# Allegro board AD9910_Finished_3rd_allegro.brd
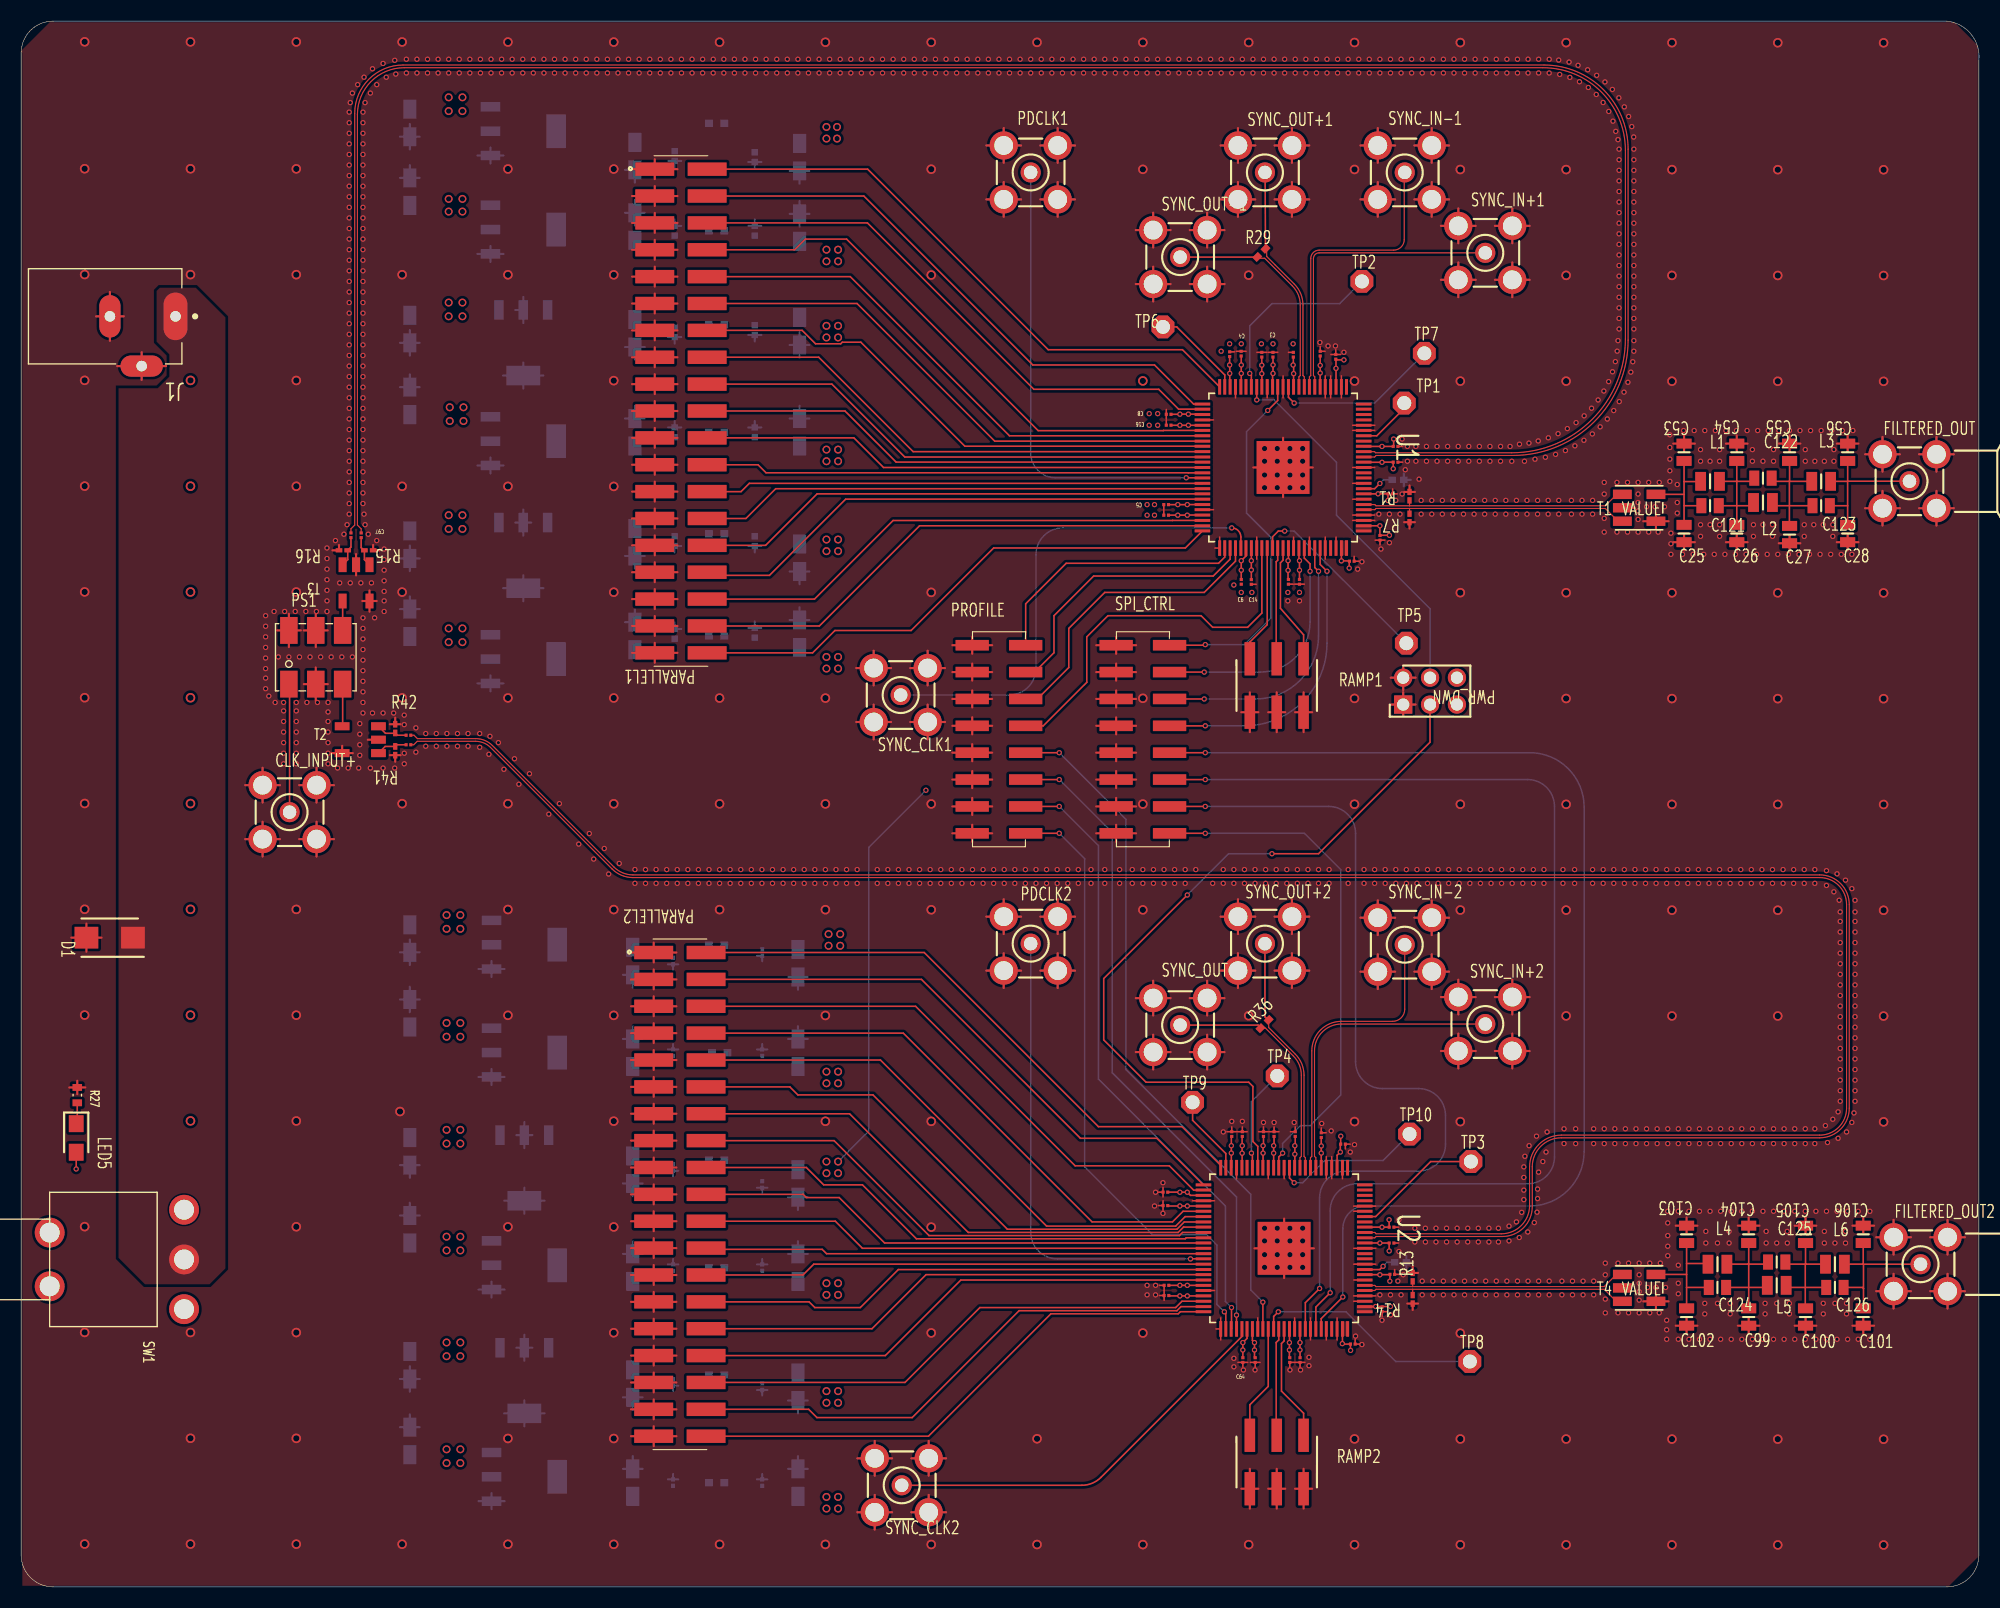
[diagram p0: board, top side]
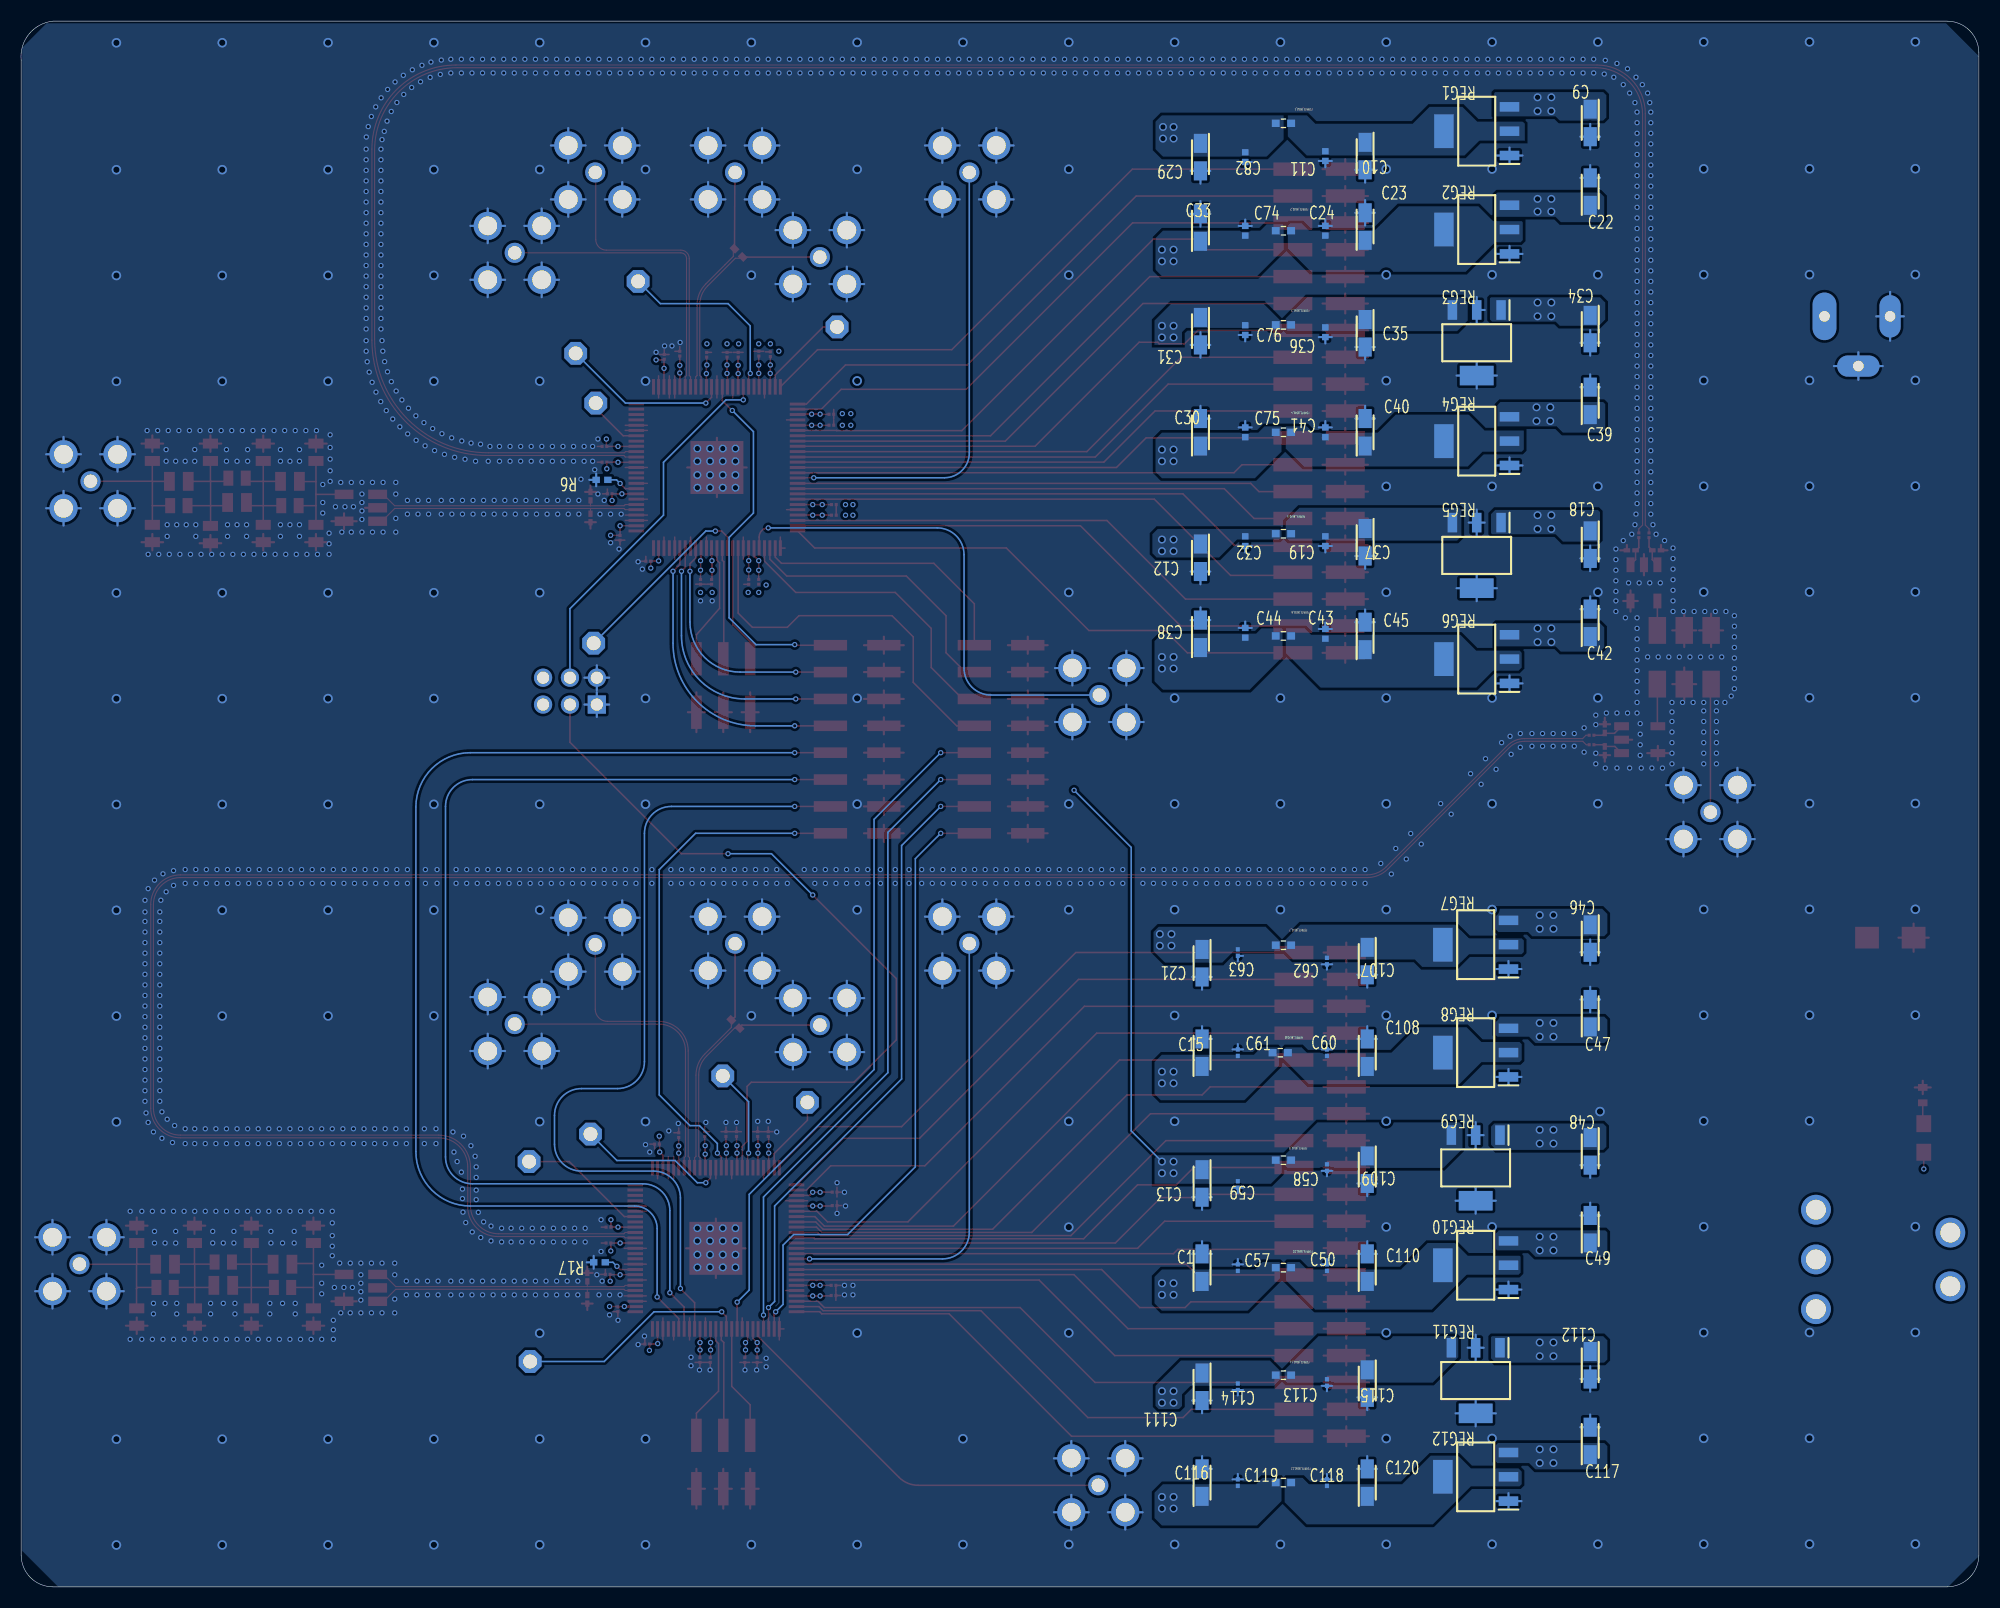
[diagram p1: board, bottom side, seen from below]

Outline 185 x 148 mm; copper layers: TOP, GND, VCC, BOTTOM. Coordinates in mm from the lower left corner of the outline.
Outline path: 0,145 arc(0.88,147.12) 3,148 182,148 arc(184.27,146.77) 185,144.3 185,3 arc(184.12,0.88) 182,0 3,0 arc(0.88,0.88) 0,3 0,145

## Design rules (mm)
constraint set DEFAULT: min track width 0.1
net group DIFF: nets IOUT2_N IOUT2_P IOUT_N IOUT_P REFCLK2_N REFCLK2_P REFCLK_N REFCLK_P SYNCIN1_N SYNCIN1_P SYNCIN2_N SYNCIN2_P SYNCOUT1_N SYNCOUT1_P SYNCOUT2_N SYNCOUT2_P
net group SINGLE: nets CLK_IN CS* CS*2 D0-1 D0-2 D1-1 D1-2 D2-1 D2-2 D3-1 D3-2 D4-1 D4-2 D5-1 D5-2 D6-1 D6-2 D7-1 D7-2 D8-1 D8-2 D9-1 D9-2 D10-1 D10-2 D11-1 D11-2 D12-1 D12-2 D13-1 D13-2 D14-1 D14-2 D15-1 D15-2 DAC_RSET DAC_RSET2 DRCTL1 DRCTL2 DRHOLD1 DRHOLD2 DROVER DROVER2 EXT_PWR_DWN EXT_PWR_DWN2 F0-1 F0-2 F1-1 F1-2 I_O_UPDATE_1 I_O_UPDATE_2 MASTER_RESET MASTER_RESET2 N5 N_1 N_5 N_6 N_7 N_8 N_9 N_20 N_22 N_26 N_32 N_36 N_40 N_41 N_42 OSK1 OSK2 PDCLK PDCLK2 PLL_LOCK PLL_LOCK2 PROFILE0 PROFILE0-2 PROFILE1 PROFILE1-2 PROFILE2 PROFILE2-2 RAM_SWP_OVER RAM_SWP_OVER2 REFCLK_OUT REFCLK_OUT2 SCLK SCLK2 SDIO SDIO2 SYNC_CLK SYNC_CLK2 SYNC_SMP_ERR SYNC_SMP_ERR2 TXENABLE1 TXENABLE2
nets with their own width: min track width 0.1; nets GND
nets with their own width: min track width 0.145; nets CLK_VDD_1 CLK_VDD_2 CLK_VDD_3 CLK_VDD_4 CLK_VDD_5 CLK_VDD_6 DAC_VDD DAC_VDD2 DVDD2(1.8V) DVDD(1.8V) DVDD_I_O2(3.3V) DVDD_I_O(3.3V) VCC

## Placement (name value [footprint] x y rotation side)
C1  VALUE  [CAPPM3216X180N]  73.41 30.17 90 bottom
C2  VALUE  [CAPC0402X22N]  120.22 116.47 90 top
C3  VALUE  [CAPC0402X22N]  118.3 116.47 90 top
C4  VALUE  [CAPC0402X22N]  115.29 116.57 90 top
C5  VALUE  [CAPC0402X22N]  108.2 102.3 180 top
C6  VALUE  [CAPC0402X22N]  115.3 95 270 top
C7  VALUE  [CAPC0402X22N]  120.8 95 270 top
C8  VALUE  [CAPC0402X22N]  108.44 110.84 180 top
C9  VALUE  [CAPPM3216X180N]  36.73 138.38 270 bottom
C10  VALUE  [CAPPM3216X180N]  58 135.25 270 bottom
C11  VALUE  [CAPC1005X22N]  61.76 135.25 270 bottom
C12  VALUE  [CAPPM3216X180N]  73.56 97.28 270 bottom
C13  VALUE  [CAPPM3216X180N]  73.41 38.13 270 bottom
C14  VALUE  [CAPC0402X22N]  116.25 94.99 270 top
C15  VALUE  [CAPPM3216X180N]  73.41 50.49 90 bottom
C16  VALUE  [CAPC0402X22N]  108.44 109.81 180 top
C17  VALUE  [CAPC0402X22N]  117.24 116.47 90 top
C18  -  [CAPPM3216X180N]  36.73 98.52 270 bottom
C19  VALUE  [CAPC1005X22N]  61.76 98.85 270 bottom
C20  VALUE  [CAPC0402X22N]  129.88 107.8 0 top
C21  VALUE  [CAPPM3216X180N]  73.41 58.95 270 bottom
C22  -  [CAPPM3216X180N]  36.73 131.89 90 bottom
C23  VALUE  [CAPPM3216X180N]  58 128.59 90 bottom
C24  VALUE  [CAPC1005X22N]  61.76 128.19 90 bottom
C25  VALUE  [CAPC2012X100N]  157.14 99.57 270 top
C26  VALUE  [CAPC2012X100N]  162.12 99.57 270 top
C27  VALUE  [CAPC2012X100N]  167.11 99.47 270 top
C28  VALUE  [CAPC2012X100N]  172.6 99.57 270 top
C29  VALUE  [CAPPM3216X180N]  73.56 135.15 270 bottom
C30  -  [CAPPM3216X180N]  73.56 109.14 90 bottom
C31  VALUE  [CAPPM3216X180N]  73.56 118.7 270 bottom
C32  VALUE  [CAPC1005X22N]  69.33 98.85 270 bottom
C33  VALUE  [CAPPM3216X180N]  73.56 128.49 90 bottom
C34  VALUE  [CAPPM3216X180N]  36.73 118.9 270 bottom
C35  VALUE  [CAPPM3216X180N]  58 118.5 270 bottom
C36  VALUE  [CAPC1005X22N]  61.76 118.6 270 bottom
C37  VALUE  [CAPPM3216X180N]  58 98.75 270 bottom
C38  VALUE  [CAPPM3216X180N]  73.56 90.09 90 bottom
C39  VALUE  [CAPPM3216X180N]  36.73 112.11 90 bottom
C40  -  [CAPPM3216X180N]  58 109.14 90 bottom
C41  VALUE  [CAPC1005X22N]  61.76 109.14 90 bottom
C42  -  [CAPPM3216X180N]  36.73 91.13 90 bottom
C43  VALUE  [CAPC1005X22N]  61.76 90.09 90 bottom
C44  VALUE  [CAPC1005X22N]  69.33 90.19 90 bottom
C45  VALUE  [CAPPM3216X180N]  58 89.89 90 bottom
C46  VALUE  [CAPPM3216X180N]  36.73 61.28 270 bottom
C47  VALUE  [CAPPM3216X180N]  36.73 54.22 90 bottom
C48  VALUE  [CAPPM3216X180N]  36.73 41.16 270 bottom
C49  VALUE  [CAPPM3216X180N]  36.73 33.81 90 bottom
C50  VALUE  [CAPC0502X28N]  61.61 30.17 90 bottom
C51  VALUE  [CAPC0402X22N]  36.6 79.6 0 top
C52  VALUE  [CAPC0402X22N]  36.6 80.5 180 top
C53  -  [CAPC2012X100N]  157.14 107.25 90 top
C54  VALUE  [CAPC2012X100N]  162.12 107.25 90 top
C55  VALUE  [CAPC2012X100N]  167.11 107.25 90 top
C56  VALUE  [CAPC2012X100N]  172.6 107.25 90 top
C57  VALUE  [CAPC0502X28N]  70.03 30.17 90 bottom
C58  VALUE  [CAPC0502X28N]  61.61 39.63 270 bottom
C59  VALUE  [CAPC0502X28N]  70.03 38.03 270 bottom
C60  VALUE  [CAPC0502X28N]  61.61 50.49 90 bottom
C61  VALUE  [CAPC0502X28N]  70.03 50.49 90 bottom
C62  VALUE  [CAPC0502X28N]  61.61 59.15 270 bottom
C63  VALUE  [CAPC0502X28N]  70.03 59.95 270 bottom
C64  VALUE  [CAPC0402X22N]  115.45 21.44 270 top
C65  VALUE  [CAPC0402X22N]  119.76 95 270 top
C66  VALUE  [CAPC0402X22N]  108.2 101.3 180 top
C67  VALUE  [CAPC0402X22N]  114.2 116.52 90 top
C68  VALUE  [CAPC0402X22N]  124.23 116.27 90 top
C69  VALUE  [CAPC0402X22N]  122.76 116.57 90 top
C70  VALUE  [CAPC0402X22N]  129.38 103.32 0 top
C71  VALUE  [CAPC0402X22N]  128.41 99.16 270 top
C72  VALUE  [CAPC0402X22N]  125.75 96.95 0 top
C73  VALUE  [CAPC0402X22N]  120.86 21.44 270 top
C74  -  [CAPC1005X22N]  69.33 128.19 90 bottom
C75  VALUE  [CAPC1005X22N]  69.33 109.14 90 bottom
C76  VALUE  [CAPC1005X22N]  69.33 118.8 270 bottom
C77  VALUE  [CAPC0402X22N]  120.4 42.8 90 top
C78  VALUE  [CAPC0402X22N]  108.23 28.5 180 top
C79  VALUE  [CAPC0402X22N]  108.13 37.31 180 top
C80  VALUE  [CAPC0402X22N]  115.4 42.8 90 top
C81  VALUE  [CAPC0402X22N]  129.88 106.31 0 top
C82  -  [CAPC1005X22N]  69.33 135.15 270 bottom
C83  VALUE  [CAPC0402X22N]  118.4 42.8 90 top
C84  VALUE  [CAPC0402X22N]  128.61 26.24 270 top
C85  VALUE  [CAPC0402X22N]  125.84 22.95 0 top
C86  VALUE  [CAPC0402X22N]  129.57 29.54 0 top
C87  VALUE  [CAPC0402X22N]  117.4 42.8 90 top
C88  VALUE  [CAPC0402X22N]  119.88 21.44 270 top
C89  VALUE  [CAPC0402X22N]  108.23 27.54 180 top
C90  VALUE  [CAPC0402X22N]  114.4 42.8 90 top
C91  VALUE  [CAPC0402X22N]  108.13 36.04 180 top
C92  VALUE  [CAPC0402X22N]  116.62 21.44 270 top
C93  VALUE  [CAPC0402X22N]  124.92 41.85 0 top
C94  VALUE  [CAPC0402X22N]  122.86 42.7 90 top
C95  VALUE  [CAPC0402X22N]  129.5 34 0 top
C96  VALUE  [CAPC0402X22N]  129.5 32.5 0 top
C97  VALUE  [CAPC0402X22N]  32.13 99.4 90 top
C98  VALUE  [CAPC0402X22N]  31.16 99.4 90 top
C99  -  [CAPC2012X100N]  163.25 25.5 270 top
C100  VALUE  [CAPC2012X100N]  168.62 25.5 270 top
C101  VALUE  [CAPC2012X100N]  174.08 25.5 270 top
C102  VALUE  [CAPC2012X100N]  157.38 25.5 270 top
C103  VALUE  [CAPC2012X100N]  157.38 33.32 90 top
C104  VALUE  [CAPC2012X100N]  163.25 33.32 90 top
C105  VALUE  [CAPC2012X100N]  168.62 33.32 90 top
C106  VALUE  [CAPC2012X100N]  174.08 33.32 90 top
C107  VALUE  [CAPPM3216X180N]  57.8 59.15 270 bottom
C108  VALUE  [CAPPM3216X180N]  57.8 50.49 90 bottom
C109  VALUE  [CAPPM3216X180N]  57.8 39.43 270 bottom
C110  VALUE  [CAPPM3216X180N]  57.8 30.17 90 bottom
C111  VALUE  [CAPPM3216X180N]  73.41 18.91 270 bottom
C112  -  [CAPPM3216X180N]  36.73 20.95 270 bottom
C113  VALUE  [CAPC0502X28N]  61.61 19.31 270 bottom
C114  VALUE  [CAPC0502X28N]  70.03 18.91 270 bottom
C115  VALUE  [CAPPM3216X180N]  57.8 19.21 270 bottom
C116  VALUE  [CAPPM3216X180N]  73.41 9.85 90 bottom
C117  -  [CAPPM3216X180N]  36.73 13.79 90 bottom
C118  VALUE  [CAPC0502X28N]  61.61 9.85 90 bottom
C119  VALUE  [CAPC0502X28N]  70.03 9.85 90 bottom
C120  VALUE  [CAPPM3216X180N]  57.8 9.85 90 bottom
C121  VALUE  [CAPC2012X100N]  159.6 102.2 0 top
C122  VALUE  [CAPC2012X100N]  164.6 104.8 0 top
C123  VALUE  [CAPC2012X100N]  170.1 102.2 0 top
C124  VALUE  [CAPC2012X100N]  160.3 28.3 0 top
C125  VALUE  [CAPC2012X100N]  165.9 30.7 0 top
C126  VALUE  [CAPC2012X100N]  171.4 28.3 0 top
CLK_INPUT+  BU-SMA-V  [CON-COAX_BU-SMA-V]  25.36 73.23 0 top
D1  SMBJ5340B-TP  [DIOM5336X241N]  8.37 61.37 180 top
FERRITE_BEAD_1  VALUE  [WE-CBF_0603_W]  65.72 138.35 0 bottom
FERRITE_BEAD_2  VALUE  [WE-CBF_0603_W]  65.72 128.19 0 bottom
FERRITE_BEAD_3  -  [WE-CBF_0603_W]  65.72 119.3 0 bottom
FERRITE_BEAD_4  -  [WE-CBF_0603_W]  65.72 109.14 0 bottom
FERRITE_BEAD_5  VALUE  [WE-CBF_0603_W]  65.72 99.55 0 bottom
FERRITE_BEAD_6  VALUE  [WE-CBF_0603_W]  65.72 89.89 0 bottom
FERRITE_BEAD_7  VALUE  [WE-CBF_0603_W]  65.72 60.65 0 bottom
FERRITE_BEAD_8  VALUE  [WE-CBF_0603_W]  66.02 50.49 0 bottom
FERRITE_BEAD_9  -  [WE-CBF_0603_W]  65.72 40.33 0 bottom
FERRITE_BEAD_10  -  [WE-CBF_0603_W]  65.72 30.17 0 bottom
FERRITE_BEAD_11  VALUE  [WE-CBF_0603_W]  65.72 20.01 0 bottom
FERRITE_BEAD_12  VALUE  [WE-CBF_0603_W]  65.72 9.85 0 bottom
FILTERED_OUT  -  [BU-SMA-H]  178.45 104.51 0 top
FILTERED_OUT2  -  [BU-SMA-H]  179.49 30.5 0 top
J1  KLDX-0202-AC  [KYCON_KLDX-0202-AC]  7.94 120.1 180 top
L1  VALUE  [LQW2BAN11NG00L]  159.6 104.5 0 top
L2  VALUE  [LQW2BAN11NG00L]  164.6 102.5 0 top
L3  VALUE  [LQW2BAN11NG00L]  170.1 104.5 0 top
L4  VALUE  [LQW2BAN11NG00L]  160.3 30.5 0 top
L5  VALUE  [LQW2BAN11NG00L]  165.9 28.5 0 top
L6  VALUE  [LQW2BAN11NG00L]  171.4 30.5 0 top
LED5  SML-811UTT86C  [LEDC3412X115N]  5.2 42.43 270 top
PARALLEL1  TSM-119-04-L-DV  [TSM-119-YY-ZZZ-DV]  62.35 111.15 90 top
PARALLEL2  TSM-119-04-L-DV  [TSM-119-YY-ZZZ-DV]  62.25 37.1 90 top
PDCLK1  BU-SMA-V  [CON-COAX_BU-SMA-V]  95.4 133.7 90 top
PDCLK2  BU-SMA-V  [CON-COAX_BU-SMA-V]  95.4 60.8 0 top
PROFILE  M20-8760842P  [M208760842P]  92.4 80.12 270 top
PS1  ADP-2-10  [CD636]  25.3 85.33 0 top
PWR_DWN  67996-106HLF  [HDRV6W67P254_2X3_762X483X858P]  130.6 83.4 0 top
R1  VALUE  [RESC0603X26N]  131.2 103.1 90 top
R6  VALUE  [RESC1005X40N]  130.11 104.64 0 bottom
R7  VALUE  [RESC0603X26N]  131.2 101.04 90 top
R13  VALUE  [RESC0603X26N]  131.5 29.27 90 top
R14  VALUE  [RESC0603X26N]  131.5 27.18 90 top
R15  VALUE  [RESC0603X28N]  32.85 97.98 180 top
R16  VALUE  [RESC0603X28N]  30.45 97.98 0 top
R17  VALUE  [RESC1005X40N]  130.35 30.68 0 bottom
R27  300  [RES_ERA3VEB3000V]  5.3 46.48 270 top
R29  VALUE  [RESC1005X35N]  117.2 126.1 45 top
R36  VALUE  [RESC1005X35N]  117.5 53.2 45 top
R41  VALUE  [RESC0603X28N]  35.35 79.03 90 top
R42  VALUE  [RESC0603X28N]  35.35 81.13 270 top
RAMP1  M20-8760342R  [M208760342R]  118.65 85.2 0 top
RAMP2  M20-8760342R  [M208760342R]  118.65 11.8 0 top
REG1  VALUE  [SOT230P700X180-4N]  47.45 137.6 0 bottom
REG2  VALUE  [SOT230P700X180-4N]  47.45 128.3 0 bottom
REG3  VALUE  [SOT230P700X180-4N]  47.45 117.6 270 bottom
REG4  VALUE  [SOT230P700X180-4N]  47.45 108.3 0 bottom
REG5  VALUE  [SOT230P700X180-4N]  47.45 97.5 270 bottom
REG6  VALUE  [SOT230P700X180-4N]  47.45 87.7 0 bottom
REG7  AZ1117CH-1.8TRG1  [SOT230P700X180-4N]  47.55 60.7 0 bottom
REG8  AZ1117CH-1.8TRG1  [SOT230P700X180-4N]  47.55 50.5 0 bottom
REG9  TPS7B8333QDCYRQ1  [SOT230P700X180-4N]  47.55 39.6 270 bottom
REG10  AZ1117CH-1.8TRG1  [SOT230P700X180-4N]  47.55 30.4 0 bottom
REG11  TPS7B8333QDCYRQ1  [SOT230P700X180-4N]  47.55 19.5 270 bottom
REG12  AZ1117CH-1.8TRG1  [SOT230P700X180-4N]  47.55 10.4 0 bottom
SPI_CTRL  M20-8760842P  [M208760842P]  106 80.12 270 top
SW1  100SP1T2B4M6QE  [TOGGLE_RA]  2.69 30.95 270 top
SYNC_CLK1  BU-SMA-V  [CON-COAX_BU-SMA-V]  83.11 84.3 90 top
SYNC_CLK2  BU-SMA-V  [CON-COAX_BU-SMA-V]  83.21 9.6 270 top
SYNC_IN+1  BU-SMA-V  [CON-COAX_BU-SMA-V]  138.36 126.1 90 top
SYNC_IN+2  BU-SMA-V  [CON-COAX_BU-SMA-V]  138.36 53.2 0 top
SYNC_IN-1  BU-SMA-V  [CON-COAX_BU-SMA-V]  130.75 133.7 90 top
SYNC_IN-2  BU-SMA-V  [CON-COAX_BU-SMA-V]  130.75 60.7 0 top
SYNC_OUT+1  BU-SMA-V  [CON-COAX_BU-SMA-V]  117.54 133.7 90 top
SYNC_OUT+2  BU-SMA-V  [CON-COAX_BU-SMA-V]  117.54 60.8 0 top
SYNC_OUT-1  BU-SMA-V  [CON-COAX_BU-SMA-V]  109.52 125.7 90 top
SYNC_OUT-2  BU-SMA-V  [CON-COAX_BU-SMA-V]  109.52 53.1 0 top
T1  TC2-72T+  [AT1521_MNC]  152.9 102 0 top
T2  ETC1-1-13TR  [SM22]  32.05 80.08 270 top
T3  ETC1-1-13TR  [SM22]  31.65 94.9 0 top
T4  TC2-72T+  [AT1521_MNC]  152.9 28.26 0 top
TP1  TPPAD1-13  [P1-13]  130.7 111.9 0 top
TP2  TPPAD1-13  [P1-13]  126.7 123.4 0 top
TP3  TPPAD1-13  [P1-13]  137 40.2 0 top
TP4  TPPAD1-13  [P1-13]  118.7 48.3 0 top
TP5  TPPAD1-13  [P1-13]  130.9 89.2 0 top
TP6  TPPAD1-13  [P1-13]  107.9 119.1 0 top
TP7  TPPAD1-13  [P1-13]  132.6 116.6 0 top
TP8  TPPAD1-13  [P1-13]  136.9 21.3 0 top
TP9  TPPAD1-13  [P1-13]  110.7 45.8 0 top
TP10  TPPAD1-13  [P1-13]  131.2 42.8 0 top
U1  AD9910BSVZ  [QFP50P1600X1600X120-101N]  119.25 105.81 270 top
U2  AD9910BSVZ  [QFP50P1600X1600X120-101N]  119.35 32 270 top

## Library data of the parts
C1 C9 C10 C12 C13 C15 C18 C21-C23 C29-C31 C33-C35 C37-C40 C42 C45-C49 C107-C112 C115-C117 C120 = CAPPM3216X180N
C2-C8 C14 C16 C17 C20 C51 C52 C64-C73 C77-C81 C83-C98 = CAPC0402X22N
C11 C19 C24 C32 C36 C41 C43 C44 C74-C76 C82 = CAPC1005X22N
C25-C28 C53-C56 C99-C106 C121-C126 = CAPC2012X100N
C50 C57-C63 C113 C114 C118 C119 = CAPC0502X28N
CLK_INPUT+ PDCLK1 PDCLK2 SYNC_CLK1 SYNC_CLK2 SYNC_IN+1 SYNC_IN+2 SYNC_IN-1 SYNC_IN-2 SYNC_OUT+1 SYNC_OUT+2 SYNC_OUT-1 SYNC_OUT-2 = CON-COAX_BU-SMA-V
D1 = DIOM5336X241N
FERRITE_BEAD_1-FERRITE_BEAD_12 = WE-CBF_0603_W
FILTERED_OUT FILTERED_OUT2 = BU-SMA-H
J1 = KYCON_KLDX-0202-AC
L1-L6 = LQW2BAN11NG00L
LED5 = LEDC3412X115N
PARALLEL1 PARALLEL2 = TSM-119-YY-ZZZ-DV
PROFILE SPI_CTRL = M208760842P
PS1 = CD636
PWR_DWN = HDRV6W67P254_2X3_762X483X858P
R1 R7 R13 R14 = RESC0603X26N
R6 R17 = RESC1005X40N
R15 R16 R41 R42 = RESC0603X28N
R27 = RES_ERA3VEB3000V
R29 R36 = RESC1005X35N
RAMP1 RAMP2 = M208760342R
REG1-REG12 = SOT230P700X180-4N
SW1 = TOGGLE_RA
T1 T4 = AT1521_MNC
T2 T3 = SM22
TP1-TP10 = P1-13
U1 U2 = QFP50P1600X1600X120-101N

## Footprints (pads in the part's own frame, mm; a bottom-side part is the same pattern mirrored in y, then rotated)
AT1521_MNC
  rect 1.778x0.889 smd: 1(-1.587,-1.27) 2(-1.587,0) 3(-1.587,1.27) 4(1.587,1.27) 6(1.587,-1.27)
BU-SMA-H
  round 1.905 hole 1.27: 1(0,0)
  round 2.667 hole 1.778: 2(-2.55,2.55) 3(2.55,2.55) 4(2.55,-2.55) 5(-2.55,-2.55)
CAPC0402X22N
  rect 0.29x0.3 smd: 1(-0.222,0) 2(0.222,0)
CAPC0502X28N
  rect 0.415x0.38 smd: 1(-0.308,0) 2(0.308,0)
CAPC1005X22N
  rect 0.6x0.62 smd: 1(-0.46,0) 2(0.46,0)
CAPC2012X100N
  rect 0.94x1.43 smd: 1(-0.82,0) 2(0.82,0)
CAPPM3216X180N
  rect 1.8x1.25 smd: 1(-1.3,0) 2(1.3,0)
CD636
  rect 1.651x2.54 smd: 1(0,0) 2(2.54,0) 3(5.08,0) 4(5.08,5.08) 5(2.54,5.08) 6(0,5.08)
CON-COAX_BU-SMA-V
  round 1.905 hole 1.27: 1(0,0)
  round 2.667 hole 1.778: 2(-2.55,2.55) 3(2.55,2.55) 4(2.55,-2.55) 5(-2.55,-2.55)
DIOM5336X241N
  rect 2.25x2.05 smd: 1(-2.2,0) 2(2.2,0)
HDRV6W67P254_2X3_762X483X858P
  rect 1.725x1.725 hole 1.15: 1(0,0)
  round 1.725 hole 1.15: 2(0,2.54) 3(2.54,0) 4(2.54,2.54) 5(5.08,0) 6(5.08,2.54)
KYCON_KLDX-0202-AC
  oval 2.25x4.5 hole 1: 1(-6.65,0)
  oval 2x4 hole 1: 2(-0.45,0)
  oval 4x2 hole 1: 3(-3.45,4.7)
LEDC3412X115N
  rect 1.6x1.4 smd: 1(-1.35,0) 2(1.35,0)
LQW2BAN11NG00L
  rect 1.02x1.78 smd: 1(-0.89,0) 2(0.89,0)
M208760342R
  rect 1x3.15 smd: 1(-2.54,-2.525) 2(-2.54,2.525) 3(0,-2.525) 4(0,2.525) 5(2.54,-2.525) 6(2.54,2.525)
M208760842P
  rect 1x3.15 smd: 1(-8.89,-2.525) 2(-8.89,2.525) 3(-6.35,-2.525) 4(-6.35,2.525) 5(-3.81,-2.525) 6(-3.81,2.525) 7(-1.27,-2.525) 8(-1.27,2.525) 9(1.27,-2.525) 10(1.27,2.525) 11(3.81,-2.525) 12(3.81,2.525) 13(6.35,-2.525) 14(6.35,2.525) 15(8.89,-2.525) 16(8.89,2.525)
P1-13
  rrect 2.159x2.159 hole 1.321: TP(0,0)
QFP50P1600X1600X120-101N
  rect 1.473x0.279 smd: 1(-7.62,5.994) 2(-7.62,5.512) 3(-7.62,5.004) 4(-7.62,4.496) 5(-7.62,3.988) 6(-7.62,3.505) 7(-7.62,2.997) 8(-7.62,2.489) 9(-7.62,2.007) 10(-7.62,1.499) 11(-7.62,0.991) 12(-7.62,0.508) 13(-7.62,0) 14(-7.62,-0.508) 15(-7.62,-0.991) 16(-7.62,-1.499) 17(-7.62,-2.007) 18(-7.62,-2.489) 19(-7.62,-2.997) 20(-7.62,-3.505) 21(-7.62,-3.988) 22(-7.62,-4.496) 23(-7.62,-5.004) 24(-7.62,-5.512) 25(-7.62,-5.994) 51(7.62,-5.994) 52(7.62,-5.512) 53(7.62,-5.004) 54(7.62,-4.496) 55(7.62,-3.988) 56(7.62,-3.505) 57(7.62,-2.997) 58(7.62,-2.489) 59(7.62,-2.007) 60(7.62,-1.499) 61(7.62,-0.991) 62(7.62,-0.508) 63(7.62,0) 64(7.62,0.508) 65(7.62,0.991) 66(7.62,1.499) 67(7.62,2.007) 68(7.62,2.489) 69(7.62,2.997) 70(7.62,3.505) 71(7.62,3.988) 72(7.62,4.496) 73(7.62,5.004) 74(7.62,5.512) 75(7.62,5.994)
  rect 0.279x1.473 smd: 26(-5.994,-7.62) 27(-5.512,-7.62) 28(-5.004,-7.62) 29(-4.496,-7.62) 30(-3.988,-7.62) 31(-3.505,-7.62) 32(-2.997,-7.62) 33(-2.489,-7.62) 34(-2.007,-7.62) 35(-1.499,-7.62) 36(-0.991,-7.62) 37(-0.508,-7.62) 38(0,-7.62) 39(0.508,-7.62) 40(0.991,-7.62) 41(1.499,-7.62) 42(2.007,-7.62) 43(2.489,-7.62) 44(2.997,-7.62) 45(3.505,-7.62) 46(3.988,-7.62) 47(4.496,-7.62) 48(5.004,-7.62) 49(5.512,-7.62) 50(5.994,-7.62) 76(5.994,7.62) 77(5.512,7.62) 78(5.004,7.62) 79(4.496,7.62) 80(3.988,7.62) 81(3.505,7.62) 82(2.997,7.62) 83(2.489,7.62) 84(2.007,7.62) 85(1.499,7.62) 86(0.991,7.62) 87(0.508,7.62) 88(0,7.62) 89(-0.508,7.62) 90(-0.991,7.62) 91(-1.499,7.62) 92(-2.007,7.62) 93(-2.489,7.62) 94(-2.997,7.62) 95(-3.505,7.62) 96(-3.988,7.62) 97(-4.496,7.62) 98(-5.004,7.62) 99(-5.512,7.62) 100(-5.994,7.62)
  rect 5.004x5.004 smd: 101(0,0)
RES_ERA3VEB3000V
  rect 0.65x0.9 smd: 1(-0.725,0) 2(0.725,0)
RESC0603X26N
  rect 0.6x0.4 smd: 1(-0.4,0) 2(0.4,0)
RESC0603X28N
  rect 0.625x0.4 smd: 1(-0.412,0) 2(0.412,0)
RESC1005X35N
  rect 0.75x0.6 smd: 1(-0.55,0) 2(0.55,0)
RESC1005X40N
  rect 0.7x0.6 smd: 1(-0.55,0) 2(0.55,0)
SM22
  rect 0.762x1.397 smd: 1(-1.27,1.714) 2(0,1.714) 3(1.27,1.714) 4(1.27,-1.714) 5(-1.27,-1.714)
SOT230P700X180-4N
  rect 1.85x0.9 smd: 1(-3.1,2.3) 2(-3.1,0) 3(-3.1,-2.3)
  rect 1.85x3.2 smd: 4(3.1,0)
TOGGLE_RA
  round 2.819 hole 1.88: 1(4.699,12.7) 2(0,12.7) 3(-4.699,12.7) P_4(-2.54,0) P_5(2.54,0)
TSM-119-YY-ZZZ-DV
  rect 1.27x3.68 smd: 1(22.86,2.475) 2(22.86,-2.475) 3(20.32,2.475) 4(20.32,-2.475) 5(17.78,2.475) 6(17.78,-2.475) 7(15.24,2.475) 8(15.24,-2.475) 9(12.7,2.475) 10(12.7,-2.475) 11(10.16,2.475) 12(10.16,-2.475) 13(7.62,2.475) 14(7.62,-2.475) 15(5.08,2.475) 16(5.08,-2.475) 17(2.54,2.475) 18(2.54,-2.475) 19(0,2.475) 20(0,-2.475) 21(-2.54,2.475) 22(-2.54,-2.475) 23(-5.08,2.475) 24(-5.08,-2.475) 25(-7.62,2.475) 26(-7.62,-2.475) 27(-10.16,2.475) 28(-10.16,-2.475) 29(-12.7,2.475) 30(-12.7,-2.475) 31(-15.24,2.475) 32(-15.24,-2.475) 33(-17.78,2.475) 34(-17.78,-2.475) 35(-20.32,2.475) 36(-20.32,-2.475) 37(-22.86,2.475) 38(-22.86,-2.475)
WE-CBF_0603_W
  rect 0.75x0.7 smd: 1(-0.725,0) 2(0.725,0)

## Nets
DVDD1.8V1: C40.1 C41.1 FERRITE_BEAD_4.1 REG4.2 REG4.4
DVDD1.8V2: C50.1 C110.1 FERRITE_BEAD_10.1 REG10.2 REG10.4
DVDD2(1.8V): C1.1 C57.1 C87.1 C88.1 C89.1 C90.1 C91.1 C92.1 FERRITE_BEAD_10.2 U2.17 U2.23 U2.30 U2.47 U2.57 U2.64
DVDD3.3V1: C35.1 C36.1 FERRITE_BEAD_3.1 REG3.3
DVDD3.3V2: C58.1 C109.1 FERRITE_BEAD_9.1 REG9.3
DVDD(1.8V): C14.1 C16.1 C17.1 C30.1 C65.1 C66.1 C67.1 C75.1 FERRITE_BEAD_4.2 U1.17 U1.23 U1.30 U1.47 U1.57 U1.64
DVDD_I_O2(3.3V): C13.1 C59.1 C64.1 C73.1 C77.1 C78.1 C79.1 C80.1 C83.1 FERRITE_BEAD_9.2 PWR_DWN.5 PWR_DWN.6 U2.11 U2.15 U2.21 U2.28 U2.45 U2.56 U2.66
DVDD_I_O(3.3V): C2.1 C3.1 C4.1 C5.1 C6.1 C7.1 C8.1 C31.1 C76.1 FERRITE_BEAD_3.2 U1.11 U1.15 U1.21 U1.28 U1.45 U1.56 U1.66
GND: C1.2 C2.2 C3.2 C4.2 C5.2 C6.2 C7.2 C8.2 C9.2 C10.2 C11.2 C12.2 C13.2 C14.2 C15.2 C16.2 C17.2 C18.2 C19.2 C20.2 C21.2 C22.2 C23.2 C24.2 C25.2 C26.2 C27.2 C28.2 C29.2 C30.2 C31.2 C32.2 C33.2 C34.2 C35.2 C36.2 C37.2 C38.2 C39.2 C40.2 C41.2 C42.2 C43.2 C44.2 C45.2 C46.2 C47.2 C48.2 C49.2 C50.2 C53.2 C54.2 C55.2 C56.2 C57.2 C58.2 C59.2 C60.2 C61.2 C62.2 C63.2 C64.2 C65.2 C66.2 C67.2 C68.2 C69.2 C70.2 C71.2 C72.2 C73.2 C74.2 C75.2 C76.2 C77.2 C78.2 C79.2 C80.2 C81.2 C82.2 C83.2 C84.2 C85.2 C86.2 C87.2 C88.2 C89.2 C90.2 C91.2 C92.2 C93.2 C94.2 C95.2 C96.2 C99.2 C100.2 C101.2 C102.2 C103.2 C104.2 C105.2 C106.2 C107.2 C108.2 C109.2 C110.2 C111.2 C112.2 C113.2 C114.2 C115.2 C116.2 C117.2 C118.2 C119.2 C120.2 CLK_INPUT+.2 CLK_INPUT+.3 CLK_INPUT+.4 CLK_INPUT+.5 D1.2 FILTERED_OUT.2 FILTERED_OUT.3 FILTERED_OUT.4 FILTERED_OUT.5 FILTERED_OUT2.2 FILTERED_OUT2.3 FILTERED_OUT2.4 FILTERED_OUT2.5 J1.2 J1.3 PARALLEL1.1 PARALLEL1.3 PARALLEL1.5 PARALLEL1.7 PARALLEL1.9 PARALLEL1.11 PARALLEL1.13 PARALLEL1.15 PARALLEL1.17 PARALLEL1.19 PARALLEL1.21 PARALLEL1.23 PARALLEL1.25 PARALLEL1.27 PARALLEL1.29 PARALLEL1.31 PARALLEL1.33 PARALLEL1.35 PARALLEL1.37 PARALLEL2.1 PARALLEL2.3 PARALLEL2.5 PARALLEL2.7 PARALLEL2.9 PARALLEL2.11 PARALLEL2.13 PARALLEL2.15 PARALLEL2.17 PARALLEL2.19 PARALLEL2.21 PARALLEL2.23 PARALLEL2.25 PARALLEL2.27 PARALLEL2.29 PARALLEL2.31 PARALLEL2.33 PARALLEL2.35 PARALLEL2.37 PDCLK1.2 PDCLK1.3 PDCLK1.4 PDCLK1.5 PDCLK2.2 PDCLK2.3 PDCLK2.4 PDCLK2.5 PROFILE.1 PROFILE.3 PROFILE.5 PROFILE.7 PROFILE.9 PROFILE.11 PROFILE.13 PROFILE.15 PS1.2 PS1.5 PS1.6 PWR_DWN.1 PWR_DWN.2 R1.2 R6.2 R7.1 R13.2 R14.1 R15.1 R16.1 R17.2 R27.1 R41.1 R42.1 RAMP1.1 RAMP1.3 RAMP1.5 RAMP2.1 RAMP2.3 RAMP2.5 REG1.1 REG2.1 REG3.2 REG3.4 REG4.1 REG5.2 REG5.4 REG6.1 REG7.1 REG8.1 REG9.2 REG9.4 REG10.1 REG11.2 REG11.4 REG12.1 SPI_CTRL.1 SPI_CTRL.3 SPI_CTRL.5 SPI_CTRL.7 SPI_CTRL.9 SPI_CTRL.11 SPI_CTRL.13 SPI_CTRL.15 SYNC_CLK1.2 SYNC_CLK1.3 SYNC_CLK1.4 SYNC_CLK1.5 SYNC_CLK2.2 SYNC_CLK2.3 SYNC_CLK2.4 SYNC_CLK2.5 SYNC_IN+1.2 SYNC_IN+1.3 SYNC_IN+1.4 SYNC_IN+1.5 SYNC_IN+2.2 SYNC_IN+2.3 SYNC_IN+2.4 SYNC_IN+2.5 SYNC_IN-1.2 SYNC_IN-1.3 SYNC_IN-1.4 SYNC_IN-1.5 SYNC_IN-2.2 SYNC_IN-2.3 SYNC_IN-2.4 SYNC_IN-2.5 SYNC_OUT+1.2 SYNC_OUT+1.3 SYNC_OUT+1.4 SYNC_OUT+1.5 SYNC_OUT+2.2 SYNC_OUT+2.3 SYNC_OUT+2.4 SYNC_OUT+2.5 SYNC_OUT-1.2 SYNC_OUT-1.3 SYNC_OUT-1.4 SYNC_OUT-1.5 SYNC_OUT-2.2 SYNC_OUT-2.3 SYNC_OUT-2.4 SYNC_OUT-2.5 T1.2 T1.6 T2.2 T2.4 T3.2 T3.4 T4.6 U1.2 U1.4 U1.5 U1.13 U1.16 U1.22 U1.29 U1.46 U1.51 U1.58 U1.65 U1.68 U1.71 U1.73 U1.78 U1.79 U1.82 U1.85 U1.88 U1.95 U1.96 U1.101 U2.2 U2.4 U2.5 U2.13 U2.16 U2.22 U2.29 U2.46 U2.51 U2.58 U2.65 U2.68 U2.71 U2.73 U2.78 U2.79 U2.82 U2.85 U2.88 U2.95 U2.96 U2.101
VCC: C9.1 C18.1 C22.1 C34.1 C39.1 C42.1 C46.1 C47.1 C48.1 C49.1 C112.1 C117.1 LED5.2 REG1.3 REG2.3 REG3.1 REG4.3 REG5.1 REG6.3 REG7.3 REG8.3 REG9.1 REG10.3 REG11.1 REG12.3 SW1.3
CKV1: C10.1 C11.1 FERRITE_BEAD_1.1 REG1.2 REG1.4
CKV2: C23.1 C24.1 FERRITE_BEAD_2.1 REG2.2 REG2.4
CKV3: C43.1 C45.1 FERRITE_BEAD_6.1 REG6.2 REG6.4
CLK4: C62.1 C107.1 FERRITE_BEAD_7.1 REG7.2 REG7.4
CLK5: C60.1 C108.1 FERRITE_BEAD_8.1 REG8.2 REG8.4
CLK6: C118.1 C120.1 FERRITE_BEAD_12.1 REG12.2 REG12.4
CLK_IN: CLK_INPUT+.1 PS1.1
CLK_VDD_1: C29.1 C68.1 C82.1 FERRITE_BEAD_1.2 U1.3
CLK_VDD_2: C33.1 C69.1 C74.1 FERRITE_BEAD_2.2 U1.6
CLK_VDD_3: C20.1 C38.1 C44.1 C81.1 FERRITE_BEAD_6.2 U1.89 U1.92
CLK_VDD_4: C21.1 C63.1 C93.1 FERRITE_BEAD_7.2 U2.3
CLK_VDD_5: C15.1 C61.1 C94.1 FERRITE_BEAD_8.2 U2.6
CLK_VDD_6: C95.1 C96.1 C116.1 C119.1 FERRITE_BEAD_12.2 U2.89 U2.92
CS*: SPI_CTRL.8 U1.70
CS*2: SPI_CTRL.10 U2.70
D0-1: PARALLEL1.34 U1.48
D0-2: PARALLEL2.34 U2.48
D1-1: PARALLEL1.32 U1.44
D1-2: PARALLEL2.32 U2.44
D2-1: PARALLEL1.30 U1.43
D2-2: PARALLEL2.30 U2.43
D3-1: PARALLEL1.28 U1.42
D3-2: PARALLEL2.28 U2.42
D4-1: PARALLEL1.24 U1.39
D4-2: PARALLEL2.24 U2.39
D5-1: PARALLEL1.22 U1.38
D5-2: PARALLEL2.22 U2.38
D6-1: PARALLEL1.20 U1.37
D6-2: PARALLEL2.20 U2.37
D7-1: PARALLEL1.18 U1.36
D7-2: PARALLEL2.18 U2.36
D8-1: PARALLEL1.16 U1.35
D8-2: PARALLEL2.16 U2.35
D9-1: PARALLEL1.14 U1.34
D9-2: PARALLEL2.14 U2.34
D10-1: PARALLEL1.12 U1.33
D10-2: PARALLEL2.12 U2.33
D11-1: PARALLEL1.10 U1.32
D11-2: PARALLEL2.10 U2.32
D12-1: PARALLEL1.8 U1.31
D12-2: PARALLEL2.8 U2.31
D13-1: PARALLEL1.6 U1.27
D13-2: PARALLEL2.6 U2.27
D14-1: PARALLEL1.4 U1.26
D14-2: PARALLEL2.4 U2.26
D15-1: PARALLEL1.2 U1.25
D15-2: PARALLEL2.2 U2.25
DAC1: C19.1 C37.1 FERRITE_BEAD_5.1 REG5.3
DAC2: C113.1 C115.1 FERRITE_BEAD_11.1 REG11.3
DAC_RSET: R6.1 U1.84
DAC_RSET2: R17.1 U2.84
DAC_VDD: C12.1 C32.1 C70.1 C71.1 C72.1 FERRITE_BEAD_5.2 U1.74 U1.75 U1.76 U1.77 U1.83
DAC_VDD2: C84.1 C85.1 C86.1 C111.1 C114.1 FERRITE_BEAD_11.2 U2.74 U2.75 U2.76 U2.77 U2.83
DRCTL1: RAMP1.4 U1.62
DRCTL2: RAMP2.4 U2.62
DRHOLD1: RAMP1.6 U1.63
DRHOLD2: RAMP2.6 U2.63
DROVER: TP5.TP U1.61
DROVER2: TP8.TP U2.61
EXT_PWR_DWN: PWR_DWN.4 U1.18
EXT_PWR_DWN2: PWR_DWN.3 U2.18
F0-1: PARALLEL1.38 U1.50
F0-2: PARALLEL2.38 U2.50
F1-1: PARALLEL1.36 U1.49
F1-2: PARALLEL2.36 U2.49
I_O_UPDATE_1: PROFILE.8 U1.59
I_O_UPDATE_2: PROFILE.10 U2.59
IOUT2_N: R14.2 T4.1 U2.80
IOUT2_P: R13.1 T4.3 U2.81
IOUT_N: R7.2 T1.1 U1.80
IOUT_P: R1.1 T1.3 U1.81
MASTER_RESET: SPI_CTRL.2 U1.14
MASTER_RESET2: SPI_CTRL.16 U2.14
N5: C51.1 R41.2 T2.3
N_1: PS1.3 T2.5
N_5: PS1.4 T3.5
N_6: C102.1 C103.1 C124.1 L4.1 T4.4
N_7: C99.1 C104.1 C124.2 C125.1 L4.2 L5.1
N_8: C100.1 C105.1 C125.2 C126.1 L5.2 L6.1
N_9: C101.1 C106.1 C126.2 FILTERED_OUT2.1 L6.2
N_20: C98.1 R16.2 T3.1
N_22: C97.1 R15.2 T3.3
N_26: LED5.1 R27.2
N_32: C52.2 R42.2 T2.1
N_36: C25.1 C53.1 C121.1 L1.1 T1.4
N_40: C26.1 C54.1 C121.2 C122.1 L1.2 L2.1
N_41: C27.1 C55.1 C122.2 C123.1 L2.2 L3.1
N_42: C28.1 C56.1 C123.2 FILTERED_OUT.1 L3.2
OSK1: RAMP1.2 U1.60
OSK2: RAMP2.2 U2.60
PDCLK: PDCLK1.1 U1.40
PDCLK2: PDCLK2.1 U2.40
PLL_LOCK: TP2.TP U1.19
PLL_LOCK2: TP4.TP U2.19
PROFILE0: PROFILE.6 U1.54
PROFILE0-2: PROFILE.12 U2.54
PROFILE1: PROFILE.4 U1.53
PROFILE1-2: PROFILE.14 U2.53
PROFILE2: PROFILE.2 U1.52
PROFILE2-2: PROFILE.16 U2.52
PWR: D1.1 J1.1 SW1.2
RAM_SWP_OVER: TP6.TP U1.24
RAM_SWP_OVER2: TP9.TP U2.24
REFCLK2_N: C51.2 U2.91
REFCLK2_P: C52.1 U2.90
REFCLK_N: C97.2 U1.91
REFCLK_OUT: TP1.TP U1.94
REFCLK_OUT2: TP3.TP U2.94
REFCLK_P: C98.2 U1.90
SCLK: SPI_CTRL.6 U1.69
SCLK2: SPI_CTRL.12 U2.69
SDIO: SPI_CTRL.4 U1.67
SDIO2: SPI_CTRL.14 U2.67
SYNC_CLK: SYNC_CLK1.1 U1.55
SYNC_CLK2: SYNC_CLK2.1 U2.55
SYNC_SMP_ERR: TP7.TP U1.12
SYNC_SMP_ERR2: TP10.TP U2.12
SYNCIN1_N: SYNC_IN-1.1 U1.8
SYNCIN1_P: SYNC_IN+1.1 U1.7
SYNCIN2_N: SYNC_IN-2.1 U2.8
SYNCIN2_P: SYNC_IN+2.1 U2.7
SYNCOUT1_N: R29.1 SYNC_OUT-1.1 U1.10
SYNCOUT1_P: R29.2 SYNC_OUT+1.1 U1.9
SYNCOUT2_N: R36.1 SYNC_OUT-2.1 U2.10
SYNCOUT2_P: R36.2 SYNC_OUT+2.1 U2.9
TXENABLE1: PARALLEL1.26 U1.41
TXENABLE2: PARALLEL2.26 U2.41

Pads without a net: SW1 1 P_4 P_5; T4 2; U1 1 20 72 86 87 93 97 98 99 100; U2 1 20 72 86 87 93 97 98 99 100

## Via types
v1: diameter 0.5, hole 0.3, TOP to BOTTOM, 1362 vias
v2: diameter 0.75, hole 0.5, TOP to BOTTOM, 128 vias
v3: diameter 0.9, hole 0.6, TOP to BOTTOM, 174 vias

## Routing (per net, layer and track width the routed paths; a pad name or vN(x,y) marks a point on that pad's centre or on a via; arc(x,y) is an arc through that point)
DVDD2(1.8V): length 18.2
  TOP w0.145: C88.1 119.85,21.69 v1(119.85,22.39) v1(119.85,23.09) 119.86,23.1 U2.64 ; U2.57 116.35,23.29 v1(116.55,23.09) v1(116.55,22.39) 116.55,21.73 C92.1 ; U2.47 111.73,27.5 v1(110.2,27.5) v1(109.5,27.5) 108.49,27.5 C89.1 ; C91.1 108.39,36 v1(109.5,36) v1(110.2,36) 111.72,36 U2.30 ; C90.1 114.36,42.54 v1(114.36,41.7) v1(114.36,41) 114.36,39.63 U2.23 ; U2.17 117.36,39.64 v1(117.36,41) v1(117.36,41.7) 117.4,41.74 C87.1
  vias: v2(76.1,28.7) v2(76.1,27.6) v2(77.2,28.7) v2(77.2,27.6)
DVDD(1.8V): length 17.9
  TOP w0.145: U1.23 114.21,113.47 v1(114.21,114.7) 114.21,115.49 v1(114.2,115.5) 114.2,116.29 ; C16.1 108.66,109.8 v1(109.5,109.8) v1(110.3,109.8) 110.3,109.8 U1.30 ; 114.2,116.29 C67.1 114.2,116.29 114.2,116.29 ; C17.1 v1(117.24,115.48) v1(117.24,114.68) 117.24,114.68 U1.17 ; C14.1 v1(116.25,96.12) v1(116.25,97) 116.25,97 U1.57 ; U1.64 119.76,97.04 v1(119.72,97) 119.72,96.09 v1(119.72,96.09) 119.72,95.32 C65.1 ; U1.47 110.21,101.31 v1(110.2,101.3) v1(109.3,101.3) C66.1
  vias: v2(76.1,107.5) v2(76.1,106.4) v2(77.2,107.5) v2(77.2,106.4)
DVDD_I_O2(3.3V): length 115.9
  TOP w0.145: C73.1 120.86,22.38 v1(120.85,22.39) v1(120.85,23.09) U2.66 ; C80.1 115.38,42.56 115.38,41.69 ; C78.1 v1(109.5,28.5) v1(110.2,28.5) 111.72,28.5 U2.45 ; U2.15 v1(118.36,41) v1(118.36,41.7) 118.4,41.74 C83.1 ; C79.1 109.49,37.31 v1(109.5,37.3) v1(110.2,37.3) 110.5,37 U2.28 ; v1(115.39,41.7) 115.38,41.69 ; 115.38,41.69 v1(115.38,40.99) 115.38,39.64 U2.21 ; U2.11 120.36,39.64 v1(120.36,40.9) v1(120.36,41.7) 120.4,41.74 C77.1 ; U2.56 115.84,23.48 v1(115.45,23.09) v1(115.45,22.39) C64.1
  VCC w0.145: v1(85.5,75.3) 127.58,75.3 PWR_DWN.5 PWR_DWN.6
  BOTTOM w0.145: v1(85.5,75.3) 80.1,69.9 80.1,43.1 v2(77.2,40.2)
  vias: v2(76.1,40.2) v2(76.1,39.1) v2(77.2,39.1)
DVDD_I_O(3.3V): length 21
  TOP w0.145: U1.45 110.2,102.3 v1(110.2,102.3) v1(109.3,102.3) C5.1 ; C7.1 120.8,95.28 v1(120.8,96.1) v1(120.8,97) 120.75,97.05 U1.66 ; U1.15 118.26,114.66 v1(118.3,114.7) v1(118.3,115.5) 118.3,116.24 C3.1 ; U1.11 120.24,114.67 v1(120.25,114.68) 120.25,115.45 v1(120.2,115.5) 120.22,115.52 C2.1 120.17,116.2 ; U1.56 115.74,97.44 v1(115.3,97) v1(115.3,96.1) C6.1 ; C4.1 115.3,116.28 v1(115.3,115.5) v1(115.3,114.7) 115.3,113.47 U1.21 ; U1.28 111.59,110.85 v1(110.3,110.85) v1(109.5,110.85) 109.49,110.84 C8.1
  vias: v1(106.4,102.3) v1(106.4,101.3) v1(106.6,110.9) v1(106.6,109.8) v1(107.1,102.3) v1(107.1,101.3) v1(107.4,110.9) v1(107.4,109.8) v1(113.4,116.8) v1(114.2,117.5) v1(114.6,94.7) v1(115.3,117.5) v1(115.3,94) v1(116.3,94) v1(117.2,117.5) v1(118.3,117.5) v1(119.7,94) v1(120.2,117.5) v1(120.8,94) v2(76.1,119.2) v2(76.1,118.1) v2(77.2,119.2) v2(77.2,118.1) v3(106,113.99)
GND: length 2262
  TOP w0.1: C68.2 124.2,116.58
  TOP w0.14: 117.85,38.58 U2.16 ; U2.65 120.34,25.42 ; 114.75,112.39 U1.22 ; 114.85,38.58 U2.22 ; 124.76,112.39 U1.2 124.76,114.47 ; 121.84,25.42 U2.68 121.84,23.34 ; 112.77,36.5 U2.29 110.69,36.5 ; U2.46 112.77,28.01 ; 125.83,100.81 U1.78 127.91,100.81 ; 123.85,38.58 U2.4 123.85,40.66 ; 112.81,98.19 U1.51 113.26,99.23 ; 123.24,99.23 U1.71 123.24,97.15 ; U1.65 120.24,99.23 ; 125.93,29 U2.82 ; 125.83,105.81 U1.88 127.91,105.81 ; 125.83,104.31 U1.85 ; 127.91,109.8 U1.96 125.83,109.8 ; 125.93,35.99 U2.96 128.01,35.99 ; 124.86,38.58 U2.2 ; U1.68 121.74,99.23 ; 124.35,25.42 U2.73 124.35,23.34 ; U2.58 116.86,25.42 ; U1.73 124.25,99.23 ; 123.75,114.47 U1.4 123.75,112.39 ; 123.34,23.34 U2.71 ; 128.01,27.5 U2.79 125.93,27.5 ; 123.34,38.58 U2.5 123.34,40.66 ; 128.01,30.5 U2.85 125.93,30.5 ; 119.25,112.39 U1.13 119.25,114.47 ; 123.24,114.47 U1.5 123.24,112.39 ; 125.93,32 U2.88 128.01,32 ; 127.91,101.31 U1.79 125.83,101.31 ; 116.76,99.23 U1.58 116.76,97.15 ; 113.36,23.34 U2.51 ; U2.51 113.36,25.42 ; U2.51 112.91,24.38 ; U1.46 112.67,101.82 ; U1.29 112.67,110.31 ; 117.75,112.39 U1.16 ; 125.93,27 U2.78 ; 125.83,109.32 U1.95 127.91,109.32 ; 125.83,102.81 U1.82 ; 119.35,38.58 U2.13 ; 125.93,35.51 U2.95
  TOP w0.145: 117.94,43.02 C83.2 ; C83.2 118.4,43.47 ; C83.2 118.86,43.02 ; 123.78,116.49 C68.2 ; C68.2 124.69,116.49 ; C68.2 124.23,116.94 ; C87.2 117.86,43.02 ; C87.2 117.4,43.47 ; C87.2 116.94,43.02 ; 107.98,101.84 C5.2 ; C66.2 107.98,101.75 ; 117.69,116.69 C17.2 116.78,116.69 ; 120.35,94.78 C7.2 121.26,94.78 ; 119.88,20.77 C88.2 120.33,21.22 ; 126.42,96.95 C72.2 125.97,97.41 ; 126.51,22.95 C85.2 126.06,23.4 ; 119.77,116.69 C2.2 ; 107.56,27.54 C89.2 ; C89.2 108.01,27.08 ; C89.2 108.01,27.99 ; 128.41,98.49 C71.2 ; C71.2 127.95,98.94 ; C71.2 128.87,98.94 ; C96.2 130.17,32.5 ; 130.06,103.32 129.6,103.32 129.6,103.78 ; 118.75,116.69 C3.2 117.84,116.69 ; 107.46,36.04 C91.2 ; C91.2 107.91,35.58 ; C91.2 107.91,36.49 ; 122.86,43.37 C94.2 123.31,42.92 ; 114.83,116.79 C4.2 115.75,116.79 ; C92.2 117.07,21.22 ; C92.2 116.62,20.77 ; C92.2 116.16,21.22 ; 125.59,41.85 C93.2 125.14,41.39 ; 115,21.22 C64.2 ; C64.2 115.91,21.22 ; C64.2 115.45,20.77 ; 113.94,43.02 C90.2 ; C90.2 114.4,43.47 ; C90.2 114.86,43.02 ; 119.94,43.02 C77.2 120.4,43.47 ; 107.56,28.5 C78.2 108.01,28.05 ; 120.4,21.22 C73.2 ; C73.2 121.31,21.22 ; C73.2 120.86,20.77 ; 128.61,25.57 C84.2 129.06,26.02 ; C80.2 115.86,43.02 ; C80.2 114.94,43.02 ; C80.2 115.4,43.47 ; C65.2 120.21,94.78 ; C95.2 130.17,34 ; 130.24,29.54 C86.2 129.79,29.99 ; C16.2 108.21,110.26 ; C67.2 114.66,116.74 ; 108.21,110.38 C8.2 108.21,111.29 ; 122.76,117.24 C69.2 123.22,116.79 ; 107.91,36.85 C79.2 ; C79.2 107.91,37.76 ; C79.2 107.46,37.31 ; C14.2 116.7,94.77 ; C81.2 130.55,106.31 ; C20.2 130.55,107.8
  TOP w0.2: PROFILE.1 89.88,89.81 ; PROFILE.1 89.88,88.2 ; PROFILE.1 91.75,89.01 ; PROFILE.1 88,89.01 ; PARALLEL2.19 59.77,38.04 ; PARALLEL2.19 57.63,37.1 ; PARALLEL2.19 59.77,36.16 ; PARALLEL2.19 61.92,37.1 ; PROFILE.5 89.88,84.73 ; PROFILE.5 89.88,83.12 ; PROFILE.5 91.75,83.93 ; PROFILE.5 88,83.93 ; CLK_INPUT+.4 27.91,72.32 ; CLK_INPUT+.4 26.28,70.68 ; CLK_INPUT+.4 29.55,70.68 ; CLK_INPUT+.4 27.91,69.04 ; 129.43,83.4 PWR_DWN.1 ; PWR_DWN.1 130.6,84.57 ; PWR_DWN.1 130.6,82.23 ; PWR_DWN.1 131.77,83.4 ; SYNC_CLK2.3 87.4,7.05 ; SYNC_CLK2.3 85.76,8.69 ; SYNC_CLK2.3 84.12,7.05 ; SYNC_CLK2.3 85.76,5.41 ; 57.73,113.69 PARALLEL1.17 ; PARALLEL1.17 59.88,114.63 ; PARALLEL1.17 59.88,112.75 ; PARALLEL1.17 62.02,113.69 ; C99.2 164.27,24.68 ; C99.2 163.25,23.91 ; C99.2 162.23,24.68 ; C99.2 163.25,25.46 ; PARALLEL2.9 59.77,50.74 ; PARALLEL2.9 59.77,48.86 ; PARALLEL2.9 61.92,49.8 ; PARALLEL2.9 57.63,49.8 ; 101.59,89.01 SPI_CTRL.1 ; SPI_CTRL.1 103.47,88.2 ; SPI_CTRL.1 103.47,89.81 ; SPI_CTRL.1 105.36,89.01 ; 34.84,81.54 R42.1 ; R42.1 35.35,82.16 ; R42.1 35.85,81.54 ; T1.6 154.49,101.48 ; T1.6 154.49,99.98 ; T1.6 155.68,100.73 ; T1.6 153.29,100.73 ; 121.19,7.39 RAMP2.5 ; RAMP2.5 121.19,11.15 ; RAMP2.5 122,9.28 ; RAMP2.5 120.39,9.28 ; SYNC_OUT-2.3 112.07,57.29 ; SYNC_OUT-2.3 112.07,54.01 ; SYNC_OUT-2.3 113.71,55.65 ; SYNC_OUT-2.3 110.44,55.65 ; 57.63,59.96 PARALLEL2.1 ; PARALLEL2.1 59.77,60.9 ; PARALLEL2.1 61.92,59.96 ; PARALLEL2.1 59.77,59.02 ; SYNC_CLK2.4 80.66,8.69 ; SYNC_CLK2.4 79.02,7.05 ; SYNC_CLK2.4 82.3,7.05 ; SYNC_CLK2.4 80.66,5.41 ; PROFILE.13 89.88,74.58 ; PROFILE.13 91.75,73.77 ; PROFILE.13 88,73.77 ; PROFILE.13 89.88,72.97 ; 175.3,33.05 FILTERED_OUT2.2 ; FILTERED_OUT2.2 176.94,34.69 ; FILTERED_OUT2.2 178.58,33.05 ; FILTERED_OUT2.2 176.94,31.41 ; 57.73,134.01 PARALLEL1.1 ; PARALLEL1.1 59.88,134.95 ; PARALLEL1.1 62.02,134.01 ; PARALLEL1.1 59.88,133.07 ; 57.63,19.32 PARALLEL2.33 ; PARALLEL2.33 59.77,18.38 ; PARALLEL2.33 59.77,20.26 ; PARALLEL2.33 61.92,19.32 ; C105.2 168.62,34.91 ; C105.2 169.64,34.14 ; C105.2 168.62,33.37 ; C105.2 167.6,34.14 ; 113.35,63.35 SYNC_OUT+2.2 ; SYNC_OUT+2.2 116.62,63.35 ; SYNC_OUT+2.2 114.99,61.71 ; SYNC_OUT+2.2 114.99,64.99 ; SYNC_IN-1.3 129.84,136.25 ; SYNC_IN-1.3 128.2,137.89 ; SYNC_IN-1.3 128.2,134.61 ; SYNC_IN-1.3 126.56,136.25 ; 57.73,90.83 PARALLEL1.35 ; PARALLEL1.35 62.02,90.83 ; PARALLEL1.35 59.88,91.77 ; PARALLEL1.35 59.88,89.89 ; C26.2 162.12,99.52 ; C26.2 163.14,98.75 ; C26.2 161.1,98.75 ; C26.2 162.12,97.97 ; 129.43,85.94 PWR_DWN.2 ; PWR_DWN.2 130.6,84.77 ; PWR_DWN.2 130.6,87.11 ; PWR_DWN.2 131.77,85.94 ; 113.35,58.25 SYNC_OUT+2.5 ; SYNC_OUT+2.5 114.99,56.61 ; SYNC_OUT+2.5 114.99,59.89 ; SYNC_OUT+2.5 116.62,58.25 ; C27.2 167.11,99.42 ; C27.2 167.11,97.87 ; C27.2 166.09,98.65 ; C27.2 168.13,98.65 ; PARALLEL1.29 62.02,98.45 ; PARALLEL1.29 57.73,98.45 ; PARALLEL1.29 59.88,97.51 ; PARALLEL1.29 59.88,99.39 ; 59.77,41.24 PARALLEL2.15 ; PARALLEL2.15 57.63,42.18 ; PARALLEL2.15 61.92,42.18 ; PARALLEL2.15 59.77,43.12 ; 59.88,110.21 PARALLEL1.19 ; PARALLEL1.19 57.73,111.15 ; PARALLEL1.19 62.02,111.15 ; PARALLEL1.19 59.88,112.09 ; 118.45,58.25 SYNC_OUT+2.4 ; SYNC_OUT+2.4 120.09,59.89 ; SYNC_OUT+2.4 121.72,58.25 ; SYNC_OUT+2.4 120.09,56.61 ; SYNC_IN+1.2 135.81,125.19 ; SYNC_IN+1.2 135.81,121.91 ; SYNC_IN+1.2 134.17,123.55 ; SYNC_IN+1.2 137.45,123.55 ; PARALLEL2.21 61.92,34.56 ; PARALLEL2.21 59.77,35.5 ; PARALLEL2.21 57.63,34.56 ; PARALLEL2.21 59.77,33.62 ; 103.47,75.5 SPI_CTRL.11 ; SPI_CTRL.11 101.59,76.31 ; SPI_CTRL.11 103.47,77.11 ; SPI_CTRL.11 105.36,76.31 ; 59.88,105.13 PARALLEL1.23 ; PARALLEL1.23 62.02,106.07 ; PARALLEL1.23 57.73,106.07 ; PARALLEL1.23 59.88,107.01 ; 57.63,57.42 PARALLEL2.3 ; PARALLEL2.3 59.77,56.48 ; PARALLEL2.3 59.77,58.36 ; PARALLEL2.3 61.92,57.42 ; C100.2 169.64,24.68 ; C100.2 167.6,24.68 ; C100.2 168.62,23.91 ; C100.2 168.62,25.46 ; C28.2 173.62,98.75 ; C28.2 172.6,99.52 ; C28.2 171.58,98.75 ; C28.2 172.6,97.97 ; 101.59,81.39 SPI_CTRL.7 ; SPI_CTRL.7 103.47,82.19 ; SPI_CTRL.7 103.47,80.58 ; SPI_CTRL.7 105.36,81.39 ; FILTERED_OUT.5 177.53,101.96 ; FILTERED_OUT.5 175.9,100.32 ; FILTERED_OUT.5 175.9,103.6 ; FILTERED_OUT.5 174.26,101.96 ; PARALLEL1.27 62.02,100.99 ; PARALLEL1.27 59.88,100.05 ; PARALLEL1.27 59.88,101.93 ; PARALLEL1.27 57.73,100.99 ; 182.04,26.31 FILTERED_OUT2.4 ; FILTERED_OUT2.4 180.4,27.95 ; FILTERED_OUT2.4 183.68,27.95 ; FILTERED_OUT2.4 182.04,29.59 ; PROFILE.15 91.75,71.23 ; PROFILE.15 89.88,72.03 ; PROFILE.15 89.88,70.42 ; PROFILE.15 88,71.23 ; 57.63,24.4 PARALLEL2.29 ; PARALLEL2.29 61.92,24.4 ; PARALLEL2.29 59.77,23.46 ; PARALLEL2.29 59.77,25.34 ; 97.95,61.71 PDCLK2.3 ; PDCLK2.3 96.31,63.35 ; PDCLK2.3 99.59,63.35 ; PDCLK2.3 97.95,64.99 ; 59.88,120.37 PARALLEL1.11 ; PARALLEL1.11 59.88,122.25 ; PARALLEL1.11 62.02,121.31 ; PARALLEL1.11 57.73,121.31 ; 96.31,131.15 PDCLK1.5 ; PDCLK1.5 97.95,132.79 ; PDCLK1.5 97.95,129.51 ; PDCLK1.5 99.59,131.15 ; 80.56,85.21 SYNC_CLK1.3 ; SYNC_CLK1.3 78.92,86.85 ; SYNC_CLK1.3 82.2,86.85 ; SYNC_CLK1.3 80.56,88.49 ; PARALLEL1.31 62.02,95.91 ; PARALLEL1.31 57.73,95.91 ; PARALLEL1.31 59.88,96.85 ; PARALLEL1.31 59.88,94.97 ; 59.88,107.67 PARALLEL1.21 ; PARALLEL1.21 59.88,109.55 ; PARALLEL1.21 62.02,108.61 ; PARALLEL1.21 57.73,108.61 ; 31.65,95.61 T3.2 31.65,97.62 ; PARALLEL2.25 59.77,30.42 ; PARALLEL2.25 61.92,29.48 ; PARALLEL2.25 59.77,28.54 ; PARALLEL2.25 57.63,29.48 ; SYNC_OUT+1.2 116.62,131.15 ; SYNC_OUT+1.2 114.99,132.79 ; SYNC_OUT+1.2 114.99,129.51 ; SYNC_OUT+1.2 113.35,131.15 ; PARALLEL1.33 59.88,94.31 ; PARALLEL1.33 62.02,93.37 ; PARALLEL1.33 59.88,92.43 ; PARALLEL1.33 57.73,93.37 ; 131.2,100.03 R7.1 ; R7.1 131.71,100.64 ; R7.1 130.69,100.64 ; 118.45,131.15 SYNC_OUT+1.5 ; SYNC_OUT+1.5 120.09,132.79 ; SYNC_OUT+1.5 120.09,129.51 ; SYNC_OUT+1.5 121.72,131.15 ; 103.47,70.42 SPI_CTRL.15 ; SPI_CTRL.15 105.36,71.23 ; SPI_CTRL.15 103.47,72.03 ; SPI_CTRL.15 101.59,71.23 ; SYNC_OUT-2.2 108.61,55.65 ; SYNC_OUT-2.2 106.97,57.29 ; SYNC_OUT-2.2 105.34,55.65 ; SYNC_OUT-2.2 106.97,54.01 ; 57.63,16.78 PARALLEL2.35 ; PARALLEL2.35 59.77,15.84 ; PARALLEL2.35 59.77,17.72 ; PARALLEL2.35 61.92,16.78 ; 174.26,107.06 FILTERED_OUT.2 ; FILTERED_OUT.2 175.9,105.42 ; FILTERED_OUT.2 177.53,107.06 ; FILTERED_OUT.2 175.9,108.7 ; 11.39,114.09 J1.3 ; J1.3 13.69,115.4 ; J1.3 11.39,116.7 ; J1.3 9.08,115.4 ; U2.101 122.16,32 ; U2.101 119.35,34.81 ; U2.101 116.54,32 ; U2.101 119.35,29.19 ; 32.92,92.18 T3.4 ; T3.4 33.6,93.19 ; T3.4 32.92,94.19 ; T3.4 32.23,93.19 ; 57.63,54.88 PARALLEL2.5 ; PARALLEL2.5 59.77,53.94 ; PARALLEL2.5 59.77,55.82 ; PARALLEL2.5 61.92,54.88 ; R13.2 132,29.67 ; R13.2 131,29.67 ; R13.2 131.5,30.28 ; 30.04,98.48 R16.1 29.42,97.98 ; 8.39,117.79 J1.2 ; J1.2 7.08,120.1 ; J1.2 9.69,120.1 ; J1.2 8.39,122.4 ; SYNC_OUT+2.3 121.72,63.35 ; SYNC_OUT+2.3 118.45,63.35 ; SYNC_OUT+2.3 120.09,61.71 ; SYNC_OUT+2.3 120.09,64.99 ; 110.44,50.55 SYNC_OUT-2.4 ; SYNC_OUT-2.4 112.07,52.19 ; SYNC_OUT-2.4 113.71,50.55 ; SYNC_OUT-2.4 112.07,48.91 ; 59.77,26 PARALLEL2.27 ; PARALLEL2.27 57.63,26.94 ; PARALLEL2.27 59.77,27.88 ; PARALLEL2.27 61.92,26.94 ; 59.88,87.35 PARALLEL1.37 ; PARALLEL1.37 62.02,88.29 ; PARALLEL1.37 57.73,88.29 ; PARALLEL1.37 59.88,89.23 ; FILTERED_OUT2.3 182.04,34.69 ; FILTERED_OUT2.3 182.04,31.41 ; FILTERED_OUT2.3 180.4,33.05 ; FILTERED_OUT2.3 183.68,33.05 ; PARALLEL1.5 59.88,129.87 ; PARALLEL1.5 57.73,128.93 ; PARALLEL1.5 62.02,128.93 ; PARALLEL1.5 59.88,127.99 ; SYNC_OUT-1.2 106.97,124.79 ; SYNC_OUT-1.2 106.97,121.51 ; SYNC_OUT-1.2 108.61,123.15 ; SYNC_OUT-1.2 105.34,123.15 ; D1.2 7.6,61.37 ; D1.2 4.74,61.37 ; D1.2 6.17,60.04 ; D1.2 6.17,62.7 ; PARALLEL2.11 61.92,47.26 ; PARALLEL2.11 59.77,48.2 ; PARALLEL2.11 59.77,46.32 ; PARALLEL2.11 57.63,47.26 ; 89.88,75.5 PROFILE.11 ; PROFILE.11 88,76.31 ; PROFILE.11 91.75,76.31 ; PROFILE.11 89.88,77.11 ; 133.3,56.51 SYNC_IN-2.4 ; SYNC_IN-2.4 133.3,59.79 ; SYNC_IN-2.4 134.94,58.15 ; SYNC_IN-2.4 131.66,58.15 ; 91.21,131.15 PDCLK1.2 ; PDCLK1.2 94.49,131.15 ; PDCLK1.2 92.85,129.51 ; PDCLK1.2 92.85,132.79 ; FILTERED_OUT2.5 176.94,29.59 ; FILTERED_OUT2.5 176.94,26.31 ; FILTERED_OUT2.5 178.58,27.95 ; FILTERED_OUT2.5 175.3,27.95 ; PS1.2 28.97,85.33 ; PS1.2 26.71,85.33 ; PS1.2 27.84,83.75 ; PS1.2 27.84,86.91 ; SYNC_IN-2.5 128.2,59.79 ; SYNC_IN-2.5 126.56,58.15 ; SYNC_IN-2.5 128.2,56.51 ; SYNC_IN-2.5 129.84,58.15 ; 140.91,49.01 SYNC_IN+2.4 ; SYNC_IN+2.4 140.91,52.29 ; SYNC_IN+2.4 142.55,50.65 ; SYNC_IN+2.4 139.27,50.65 ; 161.1,108.07 C54.2 ; C54.2 162.12,108.84 ; C54.2 162.12,107.29 ; C54.2 163.14,108.07 ; 106.97,126.61 SYNC_OUT-1.3 ; SYNC_OUT-1.3 108.61,128.25 ; SYNC_OUT-1.3 106.97,129.89 ; SYNC_OUT-1.3 105.34,128.25 ; 174.08,33.37 C106.2 ; C106.2 173.06,34.14 ; C106.2 175.1,34.14 ; C106.2 174.08,34.91 ; PARALLEL2.17 59.77,40.58 ; PARALLEL2.17 57.63,39.64 ; PARALLEL2.17 59.77,38.7 ; PARALLEL2.17 61.92,39.64 ; 131.5,26.17 R14.1 ; R14.1 132,26.78 ; R14.1 131,26.78 ; 21.18,70.68 CLK_INPUT+.5 ; CLK_INPUT+.5 22.81,69.04 ; CLK_INPUT+.5 22.81,72.32 ; CLK_INPUT+.5 24.45,70.68 ; 120.09,134.61 SYNC_OUT+1.4 ; SYNC_OUT+1.4 118.45,136.25 ; SYNC_OUT+1.4 120.09,137.89 ; SYNC_OUT+1.4 121.72,136.25 ; SYNC_CLK1.4 85.66,88.49 ; SYNC_CLK1.4 84.02,86.85 ; SYNC_CLK1.4 85.66,85.21 ; SYNC_CLK1.4 87.3,86.85 ; PS1.6 26.43,90.41 ; PS1.6 24.17,90.41 ; PS1.6 25.3,91.98 ; PS1.6 25.3,88.83 ; 59.88,125.45 PARALLEL1.7 ; PARALLEL1.7 57.73,126.39 ; PARALLEL1.7 59.88,127.33 ; PARALLEL1.7 62.02,126.39 ; PARALLEL2.13 59.77,45.66 ; PARALLEL2.13 57.63,44.72 ; PARALLEL2.13 59.77,43.78 ; PARALLEL2.13 61.92,44.72 ; 92.85,56.61 PDCLK2.5 ; PDCLK2.5 94.49,58.25 ; PDCLK2.5 92.85,59.89 ; PDCLK2.5 91.21,58.25 ; 105.34,50.55 SYNC_OUT-2.5 ; SYNC_OUT-2.5 106.97,52.19 ; SYNC_OUT-2.5 106.97,48.91 ; SYNC_OUT-2.5 108.61,50.55 ; 110.44,123.15 SYNC_OUT-1.5 ; SYNC_OUT-1.5 113.71,123.15 ; SYNC_OUT-1.5 112.07,124.79 ; SYNC_OUT-1.5 112.07,121.51 ; C101.2 174.08,25.46 ; C101.2 173.06,24.68 ; C101.2 175.1,24.68 ; C101.2 174.08,23.91 ; C53.2 157.14,108.84 ; C53.2 156.12,108.07 ; C53.2 157.14,107.29 ; C53.2 158.16,108.07 ; 92.85,61.71 PDCLK2.2 ; PDCLK2.2 94.49,63.35 ; PDCLK2.2 91.21,63.35 ; PDCLK2.2 92.85,64.99 ; FILTERED_OUT.4 182.63,101.96 ; FILTERED_OUT.4 179.36,101.96 ; FILTERED_OUT.4 181,100.32 ; FILTERED_OUT.4 181,103.6 ; C55.2 168.13,108.07 ; C55.2 167.11,107.29 ; C55.2 167.11,108.84 ; C55.2 166.09,108.07 ; RAMP2.1 116.92,9.28 ; RAMP2.1 116.11,7.39 ; RAMP2.1 116.11,11.15 ; RAMP2.1 115.31,9.28 ; SYNC_IN-1.4 133.3,137.89 ; SYNC_IN-1.4 133.3,134.61 ; SYNC_IN-1.4 134.94,136.25 ; SYNC_IN-1.4 131.66,136.25 ; 35.35,78 R41.1 ; R41.1 35.85,78.62 ; R41.1 34.84,78.62 ; 156.36,24.68 C102.2 ; C102.2 158.4,24.68 ; C102.2 157.38,23.91 ; C102.2 157.38,25.46 ; C103.2 158.4,34.14 ; C103.2 157.38,34.91 ; C103.2 157.38,33.37 ; C103.2 156.36,34.14 ; SYNC_OUT-1.4 112.07,129.89 ; SYNC_OUT-1.4 113.71,128.25 ; SYNC_OUT-1.4 112.07,126.61 ; SYNC_OUT-1.4 110.44,128.25 ; SYNC_CLK1.5 85.66,83.39 ; SYNC_CLK1.5 85.66,80.11 ; SYNC_CLK1.5 87.3,81.75 ; SYNC_CLK1.5 84.02,81.75 ; 118.65,80.8 RAMP1.3 ; RAMP1.3 119.45,82.67 ; RAMP1.3 117.84,82.67 ; RAMP1.3 118.65,84.56 ; 171.58,108.07 C56.2 ; C56.2 172.6,107.29 ; C56.2 172.6,108.84 ; C56.2 173.62,108.07 ; 97.95,134.61 PDCLK1.4 ; PDCLK1.4 96.31,136.25 ; PDCLK1.4 97.95,137.89 ; PDCLK1.4 99.59,136.25 ; 154.49,26.24 T4.6 ; T4.6 154.49,27.74 ; T4.6 155.68,26.99 ; T4.6 153.29,26.99 ; FILTERED_OUT.3 181,108.7 ; FILTERED_OUT.3 181,105.42 ; FILTERED_OUT.3 182.63,107.06 ; FILTERED_OUT.3 179.36,107.06 ; SYNC_OUT+1.3 114.99,137.89 ; SYNC_OUT+1.3 113.35,136.25 ; SYNC_OUT+1.3 116.62,136.25 ; SYNC_OUT+1.3 114.99,134.61 ; U1.101 122.06,105.81 ; U1.101 119.25,103 ; U1.101 119.25,108.62 ; U1.101 116.44,105.81 ; 117.84,9.28 RAMP2.3 ; RAMP2.3 118.65,7.39 ; RAMP2.3 118.65,11.15 ; RAMP2.3 119.45,9.28 ; 101.59,83.93 SPI_CTRL.5 ; SPI_CTRL.5 103.47,83.12 ; SPI_CTRL.5 103.47,84.73 ; SPI_CTRL.5 105.36,83.93 ; C104.2 164.27,34.14 ; C104.2 163.25,33.37 ; C104.2 163.25,34.91 ; C104.2 162.23,34.14 ; 115.31,82.67 RAMP1.1 ; RAMP1.1 116.92,82.67 ; RAMP1.1 116.11,80.8 ; RAMP1.1 116.11,84.56 ; PROFILE.3 89.88,87.28 ; PROFILE.3 91.75,86.47 ; PROFILE.3 89.88,85.67 ; PROFILE.3 88,86.47 ; 103.47,85.67 SPI_CTRL.3 ; SPI_CTRL.3 105.36,86.47 ; SPI_CTRL.3 101.59,86.47 ; SPI_CTRL.3 103.47,87.28 ; 131.66,63.25 SYNC_IN-2.3 ; SYNC_IN-2.3 134.94,63.25 ; SYNC_IN-2.3 133.3,61.61 ; SYNC_IN-2.3 133.3,64.89 ; 135.81,49.01 SYNC_IN+2.5 ; SYNC_IN+2.5 137.45,50.65 ; SYNC_IN+2.5 135.81,52.29 ; SYNC_IN+2.5 134.17,50.65 ; 103.47,78.05 SPI_CTRL.9 ; SPI_CTRL.9 103.47,79.66 ; SPI_CTRL.9 101.59,78.85 ; SPI_CTRL.9 105.36,78.85 ; 140.91,127.01 SYNC_IN+1.4 ; SYNC_IN+1.4 142.55,128.65 ; SYNC_IN+1.4 139.27,128.65 ; SYNC_IN+1.4 140.91,130.29 ; R1.2 131.2,104.11 ; R1.2 131.71,103.5 ; R1.2 130.69,103.5 ; PARALLEL2.23 59.77,32.96 ; PARALLEL2.23 61.92,32.02 ; PARALLEL2.23 57.63,32.02 ; PARALLEL2.23 59.77,31.08 ; 4.55,47.21 R27.1 ; R27.1 5.3,47.84 ; R27.1 5.3,46.58 ; R27.1 6.06,47.21 ; PDCLK2.4 97.95,59.89 ; PDCLK2.4 97.95,56.61 ; PDCLK2.4 96.31,58.25 ; PDCLK2.4 99.59,58.25 ; PARALLEL2.31 61.92,21.86 ; PARALLEL2.31 57.63,21.86 ; PARALLEL2.31 59.77,20.92 ; PARALLEL2.31 59.77,22.8 ; SYNC_IN+1.3 135.81,130.29 ; SYNC_IN+1.3 134.17,128.65 ; SYNC_IN+1.3 137.45,128.65 ; SYNC_IN+1.3 135.81,127.01 ; 26.28,75.78 CLK_INPUT+.3 ; CLK_INPUT+.3 27.91,74.14 ; CLK_INPUT+.3 27.91,77.42 ; CLK_INPUT+.3 29.55,75.78 ; PDCLK1.3 94.49,136.25 ; PDCLK1.3 91.21,136.25 ; PDCLK1.3 92.85,134.61 ; PDCLK1.3 92.85,137.89 ; PARALLEL1.15 62.02,116.23 ; PARALLEL1.15 59.88,115.29 ; PARALLEL1.15 59.88,117.17 ; PARALLEL1.15 57.73,116.23 ; SPI_CTRL.13 103.47,74.58 ; SPI_CTRL.13 103.47,72.97 ; SPI_CTRL.13 105.36,73.77 ; SPI_CTRL.13 101.59,73.77 ; 126.56,63.25 SYNC_IN-2.2 ; SYNC_IN-2.2 128.2,64.89 ; SYNC_IN-2.2 128.2,61.61 ; SYNC_IN-2.2 129.84,63.25 ; PARALLEL2.7 59.77,53.28 ; PARALLEL2.7 61.92,52.34 ; PARALLEL2.7 59.77,51.4 ; PARALLEL2.7 57.63,52.34 ; 80.66,10.51 SYNC_CLK2.5 ; SYNC_CLK2.5 79.02,12.15 ; SYNC_CLK2.5 82.3,12.15 ; SYNC_CLK2.5 80.66,13.79 ; 89.88,80.58 PROFILE.7 ; PROFILE.7 88,81.39 ; PROFILE.7 91.75,81.39 ; PROFILE.7 89.88,82.19 ; 33.88,97.98 R15.1 33.26,98.48 ; PARALLEL1.9 62.02,123.85 ; PARALLEL1.9 59.88,122.91 ; PARALLEL1.9 57.73,123.85 ; PARALLEL1.9 59.88,124.79 ; 80.56,80.11 SYNC_CLK1.2 ; SYNC_CLK1.2 78.92,81.75 ; SYNC_CLK1.2 80.56,83.39 ; SYNC_CLK1.2 82.2,81.75 ; PARALLEL2.37 59.77,15.18 ; PARALLEL2.37 57.63,14.24 ; PARALLEL2.37 59.77,13.3 ; PARALLEL2.37 61.92,14.24 ; RAMP1.5 122,82.67 ; RAMP1.5 120.39,82.67 ; RAMP1.5 121.19,84.56 ; RAMP1.5 121.19,80.8 ; T1.2 152.51,102 ; PARALLEL1.3 59.88,132.41 ; PARALLEL1.3 59.88,130.53 ; PARALLEL1.3 62.02,131.47 ; PARALLEL1.3 57.73,131.47 ; 139.27,55.75 SYNC_IN+2.3 ; SYNC_IN+2.3 142.55,55.75 ; SYNC_IN+2.3 140.91,54.11 ; SYNC_IN+2.3 140.91,57.39 ; C25.2 157.14,99.52 ; C25.2 158.16,98.75 ; C25.2 156.12,98.75 ; C25.2 157.14,97.97 ; 22.81,74.14 CLK_INPUT+.2 ; CLK_INPUT+.2 22.81,77.42 ; CLK_INPUT+.2 24.45,75.78 ; CLK_INPUT+.2 21.18,75.78 ; 140.91,121.91 SYNC_IN+1.5 ; SYNC_IN+1.5 142.55,123.55 ; SYNC_IN+1.5 140.91,125.19 ; SYNC_IN+1.5 139.27,123.55 ; SYNC_IN-1.5 134.94,131.15 ; SYNC_IN-1.5 131.66,131.15 ; SYNC_IN-1.5 133.3,132.79 ; SYNC_IN-1.5 133.3,129.51 ; SYNC_IN-1.2 129.84,131.15 ; SYNC_IN-1.2 128.2,132.79 ; SYNC_IN-1.2 128.2,129.51 ; SYNC_IN-1.2 126.56,131.15 ; 32.76,80.08 T2.2 ; PS1.5 27.84,91.98 ; PS1.5 28.97,90.41 ; PS1.5 27.84,88.83 ; PS1.5 26.71,90.41 ; T2.4 30.33,79.49 ; T2.4 29.33,78.81 ; T2.4 30.33,78.12 ; T2.4 31.34,78.81 ; 59.88,117.83 PARALLEL1.13 ; PARALLEL1.13 59.88,119.71 ; PARALLEL1.13 57.73,118.77 ; PARALLEL1.13 62.02,118.77 ; 89.88,78.05 PROFILE.9 ; PROFILE.9 91.75,78.85 ; PROFILE.9 88,78.85 ; PROFILE.9 89.88,79.66 ; PARALLEL1.25 59.88,104.47 ; PARALLEL1.25 62.02,103.53 ; PARALLEL1.25 57.73,103.53 ; PARALLEL1.25 59.88,102.59 ; 134.17,55.75 SYNC_IN+2.2 ; SYNC_IN+2.2 135.81,57.39 ; SYNC_IN+2.2 137.45,55.75 ; SYNC_IN+2.2 135.81,54.11 ; SYNC_CLK2.2 85.76,13.79 ; SYNC_CLK2.2 85.76,10.51 ; SYNC_CLK2.2 84.12,12.15 ; SYNC_CLK2.2 87.4,12.15
  GND w0.2: SYNC_IN-2.2 128.2,64.89 ; SYNC_IN-2.2 129.84,63.25 ; SYNC_IN-2.2 128.2,61.61 ; SYNC_IN-2.2 126.56,63.25 ; SYNC_OUT-2.4 113.71,50.55 ; SYNC_OUT-2.4 112.07,48.91 ; SYNC_OUT-2.4 110.44,50.55 ; SYNC_OUT-2.4 112.07,52.19 ; 181,105.42 FILTERED_OUT.3 ; FILTERED_OUT.3 181,108.7 ; FILTERED_OUT.3 182.63,107.06 ; FILTERED_OUT.3 179.36,107.06 ; SYNC_OUT-1.4 112.07,129.89 ; SYNC_OUT-1.4 113.71,128.25 ; SYNC_OUT-1.4 110.44,128.25 ; SYNC_OUT-1.4 112.07,126.61 ; 134.17,55.75 SYNC_IN+2.2 ; SYNC_IN+2.2 135.81,57.39 ; SYNC_IN+2.2 135.81,54.11 ; SYNC_IN+2.2 137.45,55.75 ; 112.07,54.01 SYNC_OUT-2.3 ; SYNC_OUT-2.3 112.07,57.29 ; SYNC_OUT-2.3 110.44,55.65 ; SYNC_OUT-2.3 113.71,55.65 ; CLK_INPUT+.3 29.55,75.78 ; CLK_INPUT+.3 26.28,75.78 ; CLK_INPUT+.3 27.91,74.14 ; CLK_INPUT+.3 27.91,77.42 ; 126.56,131.15 SYNC_IN-1.2 ; SYNC_IN-1.2 128.2,129.51 ; SYNC_IN-1.2 129.84,131.15 ; SYNC_IN-1.2 128.2,132.79 ; 97.95,61.71 PDCLK2.3 ; PDCLK2.3 99.59,63.35 ; PDCLK2.3 96.31,63.35 ; PDCLK2.3 97.95,64.99 ; 106.97,126.61 SYNC_OUT-1.3 ; SYNC_OUT-1.3 105.34,128.25 ; SYNC_OUT-1.3 108.61,128.25 ; SYNC_OUT-1.3 106.97,129.89 ; 139.27,128.65 SYNC_IN+1.4 ; SYNC_IN+1.4 140.91,130.29 ; SYNC_IN+1.4 140.91,127.01 ; SYNC_IN+1.4 142.55,128.65 ; FILTERED_OUT2.2 178.58,33.05 ; FILTERED_OUT2.2 176.94,34.69 ; FILTERED_OUT2.2 175.3,33.05 ; FILTERED_OUT2.2 176.94,31.41 ; 113.35,63.35 SYNC_OUT+2.2 ; SYNC_OUT+2.2 116.62,63.35 ; SYNC_OUT+2.2 114.99,61.71 ; SYNC_OUT+2.2 114.99,64.99 ; SYNC_IN+2.5 137.45,50.65 ; SYNC_IN+2.5 134.17,50.65 ; SYNC_IN+2.5 135.81,52.29 ; SYNC_IN+2.5 135.81,49.01 ; SYNC_IN-1.5 134.94,131.15 ; SYNC_IN-1.5 131.66,131.15 ; SYNC_IN-1.5 133.3,129.51 ; SYNC_IN-1.5 133.3,132.79 ; PDCLK2.4 97.95,59.89 ; PDCLK2.4 96.31,58.25 ; PDCLK2.4 99.59,58.25 ; PDCLK2.4 97.95,56.61 ; FILTERED_OUT.2 177.53,107.06 ; FILTERED_OUT.2 175.9,108.7 ; FILTERED_OUT.2 174.26,107.06 ; FILTERED_OUT.2 175.9,105.42 ; PDCLK2.5 92.85,59.89 ; PDCLK2.5 94.49,58.25 ; PDCLK2.5 91.21,58.25 ; PDCLK2.5 92.85,56.61 ; 105.34,50.55 SYNC_OUT-2.5 ; SYNC_OUT-2.5 106.97,48.91 ; SYNC_OUT-2.5 106.97,52.19 ; SYNC_OUT-2.5 108.61,50.55 ; CLK_INPUT+.4 29.55,70.68 ; CLK_INPUT+.4 27.91,72.32 ; CLK_INPUT+.4 26.28,70.68 ; CLK_INPUT+.4 27.91,69.04 ; FILTERED_OUT.5 177.53,101.96 ; FILTERED_OUT.5 175.9,100.32 ; FILTERED_OUT.5 174.26,101.96 ; FILTERED_OUT.5 175.9,103.6 ; 22.81,74.14 CLK_INPUT+.2 ; CLK_INPUT+.2 24.45,75.78 ; CLK_INPUT+.2 21.18,75.78 ; CLK_INPUT+.2 22.81,77.42 ; 91.21,63.35 PDCLK2.2 ; PDCLK2.2 92.85,64.99 ; PDCLK2.2 94.49,63.35 ; PDCLK2.2 92.85,61.71 ; SYNC_OUT+1.4 120.09,137.89 ; SYNC_OUT+1.4 120.09,134.61 ; SYNC_OUT+1.4 118.45,136.25 ; SYNC_OUT+1.4 121.72,136.25 ; 106.97,121.51 SYNC_OUT-1.2 ; SYNC_OUT-1.2 105.34,123.15 ; SYNC_OUT-1.2 106.97,124.79 ; SYNC_OUT-1.2 108.61,123.15 ; PDCLK1.4 99.59,136.25 ; PDCLK1.4 97.95,134.61 ; PDCLK1.4 96.31,136.25 ; PDCLK1.4 97.95,137.89 ; 135.81,121.91 SYNC_IN+1.2 ; SYNC_IN+1.2 135.81,125.19 ; SYNC_IN+1.2 137.45,123.55 ; SYNC_IN+1.2 134.17,123.55 ; 21.18,70.68 CLK_INPUT+.5 ; CLK_INPUT+.5 22.81,69.04 ; CLK_INPUT+.5 22.81,72.32 ; CLK_INPUT+.5 24.45,70.68 ; SYNC_CLK2.2 85.76,13.79 ; SYNC_CLK2.2 84.12,12.15 ; SYNC_CLK2.2 85.76,10.51 ; SYNC_CLK2.2 87.4,12.15 ; SYNC_CLK2.3 85.76,8.69 ; SYNC_CLK2.3 84.12,7.05 ; SYNC_CLK2.3 85.76,5.41 ; SYNC_CLK2.3 87.4,7.05 ; 140.91,121.91 SYNC_IN+1.5 ; SYNC_IN+1.5 142.55,123.55 ; SYNC_IN+1.5 139.27,123.55 ; SYNC_IN+1.5 140.91,125.19 ; 92.85,134.61 PDCLK1.3 ; PDCLK1.3 91.21,136.25 ; PDCLK1.3 94.49,136.25 ; PDCLK1.3 92.85,137.89 ; 78.92,86.85 SYNC_CLK1.3 ; SYNC_CLK1.3 80.56,88.49 ; SYNC_CLK1.3 80.56,85.21 ; SYNC_CLK1.3 82.2,86.85 ; SYNC_OUT-2.2 108.61,55.65 ; SYNC_OUT-2.2 106.97,57.29 ; SYNC_OUT-2.2 106.97,54.01 ; SYNC_OUT-2.2 105.34,55.65 ; SYNC_IN+2.4 140.91,52.29 ; SYNC_IN+2.4 139.27,50.65 ; SYNC_IN+2.4 140.91,49.01 ; SYNC_IN+2.4 142.55,50.65 ; 133.3,56.51 SYNC_IN-2.4 ; SYNC_IN-2.4 134.94,58.15 ; SYNC_IN-2.4 133.3,59.79 ; SYNC_IN-2.4 131.66,58.15 ; 8.39,117.79 J1.2 ; J1.2 9.69,120.1 ; J1.2 7.08,120.1 ; J1.2 8.39,122.4 ; 80.56,80.11 SYNC_CLK1.2 ; SYNC_CLK1.2 82.2,81.75 ; SYNC_CLK1.2 80.56,83.39 ; SYNC_CLK1.2 78.92,81.75 ; 112.07,121.51 SYNC_OUT-1.5 ; SYNC_OUT-1.5 112.07,124.79 ; SYNC_OUT-1.5 113.71,123.15 ; SYNC_OUT-1.5 110.44,123.15 ; SYNC_IN+2.3 142.55,55.75 ; SYNC_IN+2.3 140.91,57.39 ; SYNC_IN+2.3 139.27,55.75 ; SYNC_IN+2.3 140.91,54.11 ; SYNC_OUT+1.5 121.72,131.15 ; SYNC_OUT+1.5 120.09,132.79 ; SYNC_OUT+1.5 118.45,131.15 ; SYNC_OUT+1.5 120.09,129.51 ; 129.43,83.4 PWR_DWN.1 ; PWR_DWN.1 131.77,83.4 ; PWR_DWN.1 130.6,82.23 ; PWR_DWN.1 130.6,84.57 ; FILTERED_OUT2.3 182.04,34.69 ; FILTERED_OUT2.3 182.04,31.41 ; FILTERED_OUT2.3 183.68,33.05 ; FILTERED_OUT2.3 180.4,33.05 ; 131.66,136.25 SYNC_IN-1.4 ; SYNC_IN-1.4 133.3,134.61 ; SYNC_IN-1.4 133.3,137.89 ; SYNC_IN-1.4 134.94,136.25 ; SYNC_OUT+2.5 114.99,59.89 ; SYNC_OUT+2.5 116.62,58.25 ; SYNC_OUT+2.5 114.99,56.61 ; SYNC_OUT+2.5 113.35,58.25 ; PDCLK1.2 94.49,131.15 ; PDCLK1.2 91.21,131.15 ; PDCLK1.2 92.85,129.51 ; PDCLK1.2 92.85,132.79 ; SYNC_CLK2.4 82.3,7.05 ; SYNC_CLK2.4 80.66,8.69 ; SYNC_CLK2.4 80.66,5.41 ; SYNC_CLK2.4 79.02,7.05 ; 180.4,27.95 FILTERED_OUT2.4 ; FILTERED_OUT2.4 182.04,29.59 ; FILTERED_OUT2.4 183.68,27.95 ; FILTERED_OUT2.4 182.04,26.31 ; 179.36,101.96 FILTERED_OUT.4 ; FILTERED_OUT.4 182.63,101.96 ; FILTERED_OUT.4 181,100.32 ; FILTERED_OUT.4 181,103.6 ; SYNC_CLK2.5 80.66,13.79 ; SYNC_CLK2.5 79.02,12.15 ; SYNC_CLK2.5 80.66,10.51 ; SYNC_CLK2.5 82.3,12.15 ; 97.95,129.51 PDCLK1.5 ; PDCLK1.5 99.59,131.15 ; PDCLK1.5 97.95,132.79 ; PDCLK1.5 96.31,131.15 ; SYNC_OUT+2.4 121.72,58.25 ; SYNC_OUT+2.4 120.09,59.89 ; SYNC_OUT+2.4 120.09,56.61 ; SYNC_OUT+2.4 118.45,58.25 ; SYNC_OUT+1.3 114.99,137.89 ; SYNC_OUT+1.3 116.62,136.25 ; SYNC_OUT+1.3 113.35,136.25 ; SYNC_OUT+1.3 114.99,134.61 ; FILTERED_OUT2.5 176.94,29.59 ; FILTERED_OUT2.5 176.94,26.31 ; FILTERED_OUT2.5 178.58,27.95 ; FILTERED_OUT2.5 175.3,27.95 ; 118.45,63.35 SYNC_OUT+2.3 ; SYNC_OUT+2.3 121.72,63.35 ; SYNC_OUT+2.3 120.09,64.99 ; SYNC_OUT+2.3 120.09,61.71 ; 113.35,131.15 SYNC_OUT+1.2 ; SYNC_OUT+1.2 114.99,129.51 ; SYNC_OUT+1.2 116.62,131.15 ; SYNC_OUT+1.2 114.99,132.79 ; J1.3 11.39,116.7 ; J1.3 13.69,115.4 ; J1.3 9.08,115.4 ; J1.3 11.39,114.09 ; SYNC_CLK1.4 85.66,88.49 ; SYNC_CLK1.4 85.66,85.21 ; SYNC_CLK1.4 87.3,86.85 ; SYNC_CLK1.4 84.02,86.85 ; PWR_DWN.2 131.77,85.94 ; PWR_DWN.2 129.43,85.94 ; PWR_DWN.2 130.6,84.77 ; PWR_DWN.2 130.6,87.11 ; 126.56,58.15 SYNC_IN-2.5 ; SYNC_IN-2.5 128.2,59.79 ; SYNC_IN-2.5 129.84,58.15 ; SYNC_IN-2.5 128.2,56.51 ; 84.02,81.75 SYNC_CLK1.5 ; SYNC_CLK1.5 85.66,83.39 ; SYNC_CLK1.5 85.66,80.11 ; SYNC_CLK1.5 87.3,81.75 ; SYNC_IN-2.3 134.94,63.25 ; SYNC_IN-2.3 131.66,63.25 ; SYNC_IN-2.3 133.3,64.89 ; SYNC_IN-2.3 133.3,61.61 ; SYNC_IN-1.3 129.84,136.25 ; SYNC_IN-1.3 126.56,136.25 ; SYNC_IN-1.3 128.2,134.61 ; SYNC_IN-1.3 128.2,137.89 ; SYNC_IN+1.3 137.45,128.65 ; SYNC_IN+1.3 135.81,127.01 ; SYNC_IN+1.3 134.17,128.65 ; SYNC_IN+1.3 135.81,130.29
  VCC w0.2: FILTERED_OUT.3 182.63,107.06 ; FILTERED_OUT.3 181,105.42 ; FILTERED_OUT.3 181,108.7 ; FILTERED_OUT.3 179.36,107.06 ; SYNC_IN-2.3 133.3,64.89 ; SYNC_IN-2.3 131.66,63.25 ; SYNC_IN-2.3 133.3,61.61 ; SYNC_IN-2.3 134.94,63.25 ; 140.91,54.11 SYNC_IN+2.3 ; SYNC_IN+2.3 142.55,55.75 ; SYNC_IN+2.3 139.27,55.75 ; SYNC_IN+2.3 140.91,57.39 ; 135.81,127.01 SYNC_IN+1.3 ; SYNC_IN+1.3 134.17,128.65 ; SYNC_IN+1.3 137.45,128.65 ; SYNC_IN+1.3 135.81,130.29 ; 182.04,26.31 FILTERED_OUT2.4 ; FILTERED_OUT2.4 180.4,27.95 ; FILTERED_OUT2.4 182.04,29.59 ; FILTERED_OUT2.4 183.68,27.95 ; SYNC_IN+1.2 137.45,123.55 ; SYNC_IN+1.2 135.81,121.91 ; SYNC_IN+1.2 135.81,125.19 ; SYNC_IN+1.2 134.17,123.55 ; J1.3 11.39,116.7 ; J1.3 9.08,115.4 ; J1.3 11.39,114.09 ; J1.3 13.69,115.4 ; CLK_INPUT+.5 24.45,70.68 ; CLK_INPUT+.5 22.81,72.32 ; CLK_INPUT+.5 21.18,70.68 ; CLK_INPUT+.5 22.81,69.04 ; 130.6,84.77 PWR_DWN.2 ; PWR_DWN.2 131.77,85.94 ; PWR_DWN.2 129.43,85.94 ; PWR_DWN.2 130.6,87.11 ; SYNC_IN+1.4 142.55,128.65 ; SYNC_IN+1.4 140.91,127.01 ; SYNC_IN+1.4 140.91,130.29 ; SYNC_IN+1.4 139.27,128.65 ; 130.6,82.23 PWR_DWN.1 ; PWR_DWN.1 129.43,83.4 ; PWR_DWN.1 130.6,84.57 ; PWR_DWN.1 131.77,83.4 ; SYNC_IN-1.5 134.94,131.15 ; SYNC_IN-1.5 133.3,129.51 ; SYNC_IN-1.5 133.3,132.79 ; SYNC_IN-1.5 131.66,131.15 ; SYNC_IN+2.2 135.81,57.39 ; SYNC_IN+2.2 137.45,55.75 ; SYNC_IN+2.2 134.17,55.75 ; SYNC_IN+2.2 135.81,54.11 ; SYNC_IN+2.5 135.81,52.29 ; SYNC_IN+2.5 135.81,49.01 ; SYNC_IN+2.5 134.17,50.65 ; SYNC_IN+2.5 137.45,50.65 ; 181,100.32 FILTERED_OUT.4 ; FILTERED_OUT.4 182.63,101.96 ; FILTERED_OUT.4 181,103.6 ; FILTERED_OUT.4 179.36,101.96 ; 175.3,33.05 FILTERED_OUT2.2 ; FILTERED_OUT2.2 176.94,31.41 ; FILTERED_OUT2.2 178.58,33.05 ; FILTERED_OUT2.2 176.94,34.69 ; 176.94,26.31 FILTERED_OUT2.5 ; FILTERED_OUT2.5 178.58,27.95 ; FILTERED_OUT2.5 175.3,27.95 ; FILTERED_OUT2.5 176.94,29.59 ; FILTERED_OUT.2 175.9,108.7 ; FILTERED_OUT.2 174.26,107.06 ; FILTERED_OUT.2 175.9,105.42 ; FILTERED_OUT.2 177.53,107.06 ; 174.26,101.96 FILTERED_OUT.5 ; FILTERED_OUT.5 175.9,100.32 ; FILTERED_OUT.5 175.9,103.6 ; FILTERED_OUT.5 177.53,101.96 ; SYNC_IN+1.5 142.55,123.55 ; SYNC_IN+1.5 140.91,125.19 ; SYNC_IN+1.5 140.91,121.91 ; SYNC_IN+1.5 139.27,123.55 ; J1.2 8.39,122.4 ; J1.2 7.08,120.1 ; J1.2 8.39,117.79 ; J1.2 9.69,120.1 ; 21.18,75.78 CLK_INPUT+.2 ; CLK_INPUT+.2 22.81,77.42 ; CLK_INPUT+.2 24.45,75.78 ; CLK_INPUT+.2 22.81,74.14 ; 180.4,33.05 FILTERED_OUT2.3 ; FILTERED_OUT2.3 183.68,33.05 ; FILTERED_OUT2.3 182.04,34.69 ; FILTERED_OUT2.3 182.04,31.41 ; 139.27,50.65 SYNC_IN+2.4 ; SYNC_IN+2.4 142.55,50.65 ; SYNC_IN+2.4 140.91,52.29 ; SYNC_IN+2.4 140.91,49.01 ; 26.28,75.78 CLK_INPUT+.3 ; CLK_INPUT+.3 27.91,77.42 ; CLK_INPUT+.3 29.55,75.78 ; CLK_INPUT+.3 27.91,74.14 ; 131.66,136.25 SYNC_IN-1.4 ; SYNC_IN-1.4 133.3,137.89 ; SYNC_IN-1.4 133.3,134.61 ; SYNC_IN-1.4 134.94,136.25 ; 27.91,69.04 CLK_INPUT+.4 ; CLK_INPUT+.4 26.28,70.68 ; CLK_INPUT+.4 29.55,70.68 ; CLK_INPUT+.4 27.91,72.32 ; 85.76,5.41 SYNC_CLK2.3 ; 133.3,56.51 SYNC_IN-2.4 ; SYNC_IN-2.4 131.66,58.15 ; SYNC_IN-2.4 134.94,58.15 ; SYNC_IN-2.4 133.3,59.79 ; 80.66,5.41 SYNC_CLK2.4
  BOTTOM w0.19: 69.53,37.72 C59.2 ; C59.2 70.03,37.21 ; C59.2 70.52,37.72 ; C118.2 61.61,10.67 ; C118.2 62.1,10.16 ; C118.2 61.11,10.16 ; C60.2 61.61,51.31 ; C60.2 62.1,50.8 ; C60.2 61.11,50.8 ; C119.2 70.52,10.16 ; C119.2 69.53,10.16 ; C119.2 70.03,10.67 ; 61.11,39.32 C58.2 ; C58.2 61.61,38.81 ; C58.2 62.1,39.32 ; C50.2 62.1,30.48 ; C50.2 61.11,30.48 ; C50.2 61.61,30.99 ; 61.11,19 C113.2 ; C113.2 62.1,19 ; C113.2 61.61,18.49 ; C57.2 70.03,30.99 ; C57.2 69.53,30.48 ; C57.2 70.52,30.48 ; 70.03,18.09 C114.2 ; C114.2 69.53,18.6 ; C114.2 70.52,18.6 ; 61.11,58.84 C62.2 ; C62.2 61.61,58.33 ; C62.2 62.1,58.84 ; 70.03,59.13 C63.2 69.53,59.64 ; C61.2 70.52,50.8 ; C61.2 69.53,50.8 ; C61.2 70.03,51.31
  BOTTOM w0.2: 61.14,118.14 C36.2 ; C36.2 61.76,117.53 ; C36.2 62.37,118.14 ; 128.2,134.61 SYNC_IN-1.3 ; SYNC_IN-1.3 128.2,137.89 ; SYNC_IN-1.3 126.56,136.25 ; SYNC_IN-1.3 129.84,136.25 ; 73.56,128.58 C33.2 ; C33.2 72.63,129.79 ; C33.2 73.56,130.99 ; C33.2 74.49,129.79 ; FILTERED_OUT.3 181,108.7 ; FILTERED_OUT.3 181,105.42 ; FILTERED_OUT.3 179.36,107.06 ; FILTERED_OUT.3 182.63,107.06 ; 112.07,54.01 SYNC_OUT-2.3 ; SYNC_OUT-2.3 110.44,55.65 ; SYNC_OUT-2.3 112.07,57.29 ; SYNC_OUT-2.3 113.71,55.65 ; 35.8,19.65 C112.2 ; C112.2 36.73,20.85 ; C112.2 36.73,18.44 ; C112.2 37.66,19.65 ; SYNC_OUT+1.3 116.62,136.25 ; SYNC_OUT+1.3 114.99,134.61 ; SYNC_OUT+1.3 113.35,136.25 ; SYNC_OUT+1.3 114.99,137.89 ; 113.35,58.25 SYNC_OUT+2.5 ; SYNC_OUT+2.5 114.99,56.61 ; SYNC_OUT+2.5 116.62,58.25 ; SYNC_OUT+2.5 114.99,59.89 ; 47.45,119.47 REG3.2 ; REG3.2 47.45,121.93 ; REG3.2 46.7,120.7 ; PDCLK1.5 97.95,132.79 ; PDCLK1.5 99.59,131.15 ; PDCLK1.5 96.31,131.15 ; PDCLK1.5 97.95,129.51 ; SYNC_CLK2.5 80.66,13.79 ; SYNC_CLK2.5 79.02,12.15 ; SYNC_CLK2.5 82.3,12.15 ; SYNC_CLK2.5 80.66,10.51 ; 43.12,135.3 REG1.1 ; REG1.1 44.35,136.06 ; REG1.1 45.58,135.3 ; REG1.1 44.35,134.54 ; 176.94,26.31 FILTERED_OUT2.5 ; FILTERED_OUT2.5 175.3,27.95 ; FILTERED_OUT2.5 176.94,29.59 ; FILTERED_OUT2.5 178.58,27.95 ; 85.76,10.51 SYNC_CLK2.2 ; SYNC_CLK2.2 85.76,13.79 ; SYNC_CLK2.2 84.12,12.15 ; SYNC_CLK2.2 87.4,12.15 ; 134.17,128.65 SYNC_IN+1.3 ; SYNC_IN+1.3 137.45,128.65 ; SYNC_IN+1.3 135.81,127.01 ; SYNC_IN+1.3 135.81,130.29 ; 106.97,54.01 SYNC_OUT-2.2 ; SYNC_OUT-2.2 105.34,55.65 ; SYNC_OUT-2.2 106.97,57.29 ; SYNC_OUT-2.2 108.61,55.65 ; SYNC_OUT-2.5 106.97,52.19 ; SYNC_OUT-2.5 108.61,50.55 ; SYNC_OUT-2.5 106.97,48.91 ; SYNC_OUT-2.5 105.34,50.55 ; SYNC_OUT-1.3 108.61,128.25 ; SYNC_OUT-1.3 105.34,128.25 ; SYNC_OUT-1.3 106.97,129.89 ; SYNC_OUT-1.3 106.97,126.61 ; SYNC_IN+1.2 137.45,123.55 ; SYNC_IN+1.2 135.81,125.19 ; SYNC_IN+1.2 135.81,121.91 ; SYNC_IN+1.2 134.17,123.55 ; C115.2 58.73,17.91 ; C115.2 56.87,17.91 ; C115.2 57.8,16.71 ; 72.63,133.85 C29.2 ; C29.2 74.49,133.85 ; C29.2 73.56,132.64 ; 45.65,36.5 REG9.4 ; REG9.4 47.55,37.73 ; REG9.4 49.45,36.5 ; REG9.4 47.55,35.27 ; C117.2 36.73,16.29 ; C117.2 35.8,15.09 ; C117.2 37.66,15.09 ; 9.08,115.4 J1.3 ; J1.3 11.39,114.09 ; J1.3 11.39,116.7 ; J1.3 13.69,115.4 ; SYNC_CLK2.3 87.4,7.05 ; SYNC_CLK2.3 85.76,5.41 ; SYNC_CLK2.3 85.76,8.69 ; SYNC_CLK2.3 84.12,7.05 ; SYNC_IN-1.4 134.94,136.25 ; SYNC_IN-1.4 133.3,137.89 ; SYNC_IN-1.4 133.3,134.61 ; SYNC_IN-1.4 131.66,136.25 ; C23.2 58.93,129.89 ; C23.2 57.07,129.89 ; C23.2 58,128.68 ; C23.2 58,131.09 ; 35.8,113.41 C39.2 ; C39.2 37.66,113.41 ; C39.2 36.73,114.61 ; SYNC_CLK1.4 87.3,86.85 ; SYNC_CLK1.4 84.02,86.85 ; SYNC_CLK1.4 85.66,88.49 ; SYNC_CLK1.4 85.66,85.21 ; 110.44,50.55 SYNC_OUT-2.4 ; SYNC_OUT-2.4 113.71,50.55 ; SYNC_OUT-2.4 112.07,52.19 ; SYNC_OUT-2.4 112.07,48.91 ; 126.56,63.25 SYNC_IN-2.2 ; SYNC_IN-2.2 128.2,61.61 ; SYNC_IN-2.2 128.2,64.89 ; SYNC_IN-2.2 129.84,63.25 ; C75.2 69.94,109.6 ; C75.2 68.71,109.6 ; C75.2 69.33,110.2 ; REG6.1 44.35,86.16 ; REG6.1 43.12,85.4 ; REG6.1 44.35,84.64 ; REG6.1 45.58,85.4 ; REG10.1 44.45,28.86 ; REG10.1 43.22,28.1 ; REG10.1 45.68,28.1 ; REG10.1 44.45,27.34 ; 134.17,55.75 SYNC_IN+2.2 ; SYNC_IN+2.2 135.81,54.11 ; SYNC_IN+2.2 137.45,55.75 ; SYNC_IN+2.2 135.81,57.39 ; 91.21,63.35 PDCLK2.2 ; PDCLK2.2 94.49,63.35 ; PDCLK2.2 92.85,61.71 ; PDCLK2.2 92.85,64.99 ; 44.45,7.34 REG12.1 ; REG12.1 43.22,8.1 ; REG12.1 45.68,8.1 ; REG12.1 44.45,8.86 ; 68.71,90.65 C44.2 ; C44.2 69.33,91.25 ; C44.2 69.94,90.65 ; 112.07,121.51 SYNC_OUT-1.5 ; SYNC_OUT-1.5 110.44,123.15 ; SYNC_OUT-1.5 113.71,123.15 ; SYNC_OUT-1.5 112.07,124.79 ; SYNC_OUT+2.3 120.09,64.99 ; SYNC_OUT+2.3 121.72,63.35 ; SYNC_OUT+2.3 118.45,63.35 ; SYNC_OUT+2.3 120.09,61.71 ; C34.2 36.73,118.8 ; C34.2 35.8,117.6 ; C34.2 37.66,117.6 ; C34.2 36.73,116.39 ; C40.2 58.93,110.44 ; C40.2 57.07,110.44 ; C40.2 58,111.64 ; 36.73,54.32 C47.2 ; C47.2 36.73,56.73 ; C47.2 37.66,55.52 ; C47.2 35.8,55.52 ; 96.31,136.25 PDCLK1.4 ; PDCLK1.4 97.95,137.89 ; PDCLK1.4 97.95,134.61 ; PDCLK1.4 99.59,136.25 ; SYNC_IN+2.4 142.55,50.65 ; SYNC_IN+2.4 139.27,50.65 ; SYNC_IN+2.4 140.91,52.29 ; SYNC_IN+2.4 140.91,49.01 ; SYNC_OUT-1.2 108.61,123.15 ; SYNC_OUT-1.2 105.34,123.15 ; SYNC_OUT-1.2 106.97,124.79 ; SYNC_OUT-1.2 106.97,121.51 ; SYNC_CLK1.5 85.66,83.39 ; SYNC_CLK1.5 84.02,81.75 ; SYNC_CLK1.5 87.3,81.75 ; SYNC_CLK1.5 85.66,80.11 ; 120.09,129.51 SYNC_OUT+1.5 ; SYNC_OUT+1.5 120.09,132.79 ; SYNC_OUT+1.5 118.45,131.15 ; SYNC_OUT+1.5 121.72,131.15 ; C46.2 36.73,61.19 ; C46.2 37.66,59.98 ; C46.2 36.73,58.78 ; C46.2 35.8,59.98 ; PDCLK2.3 97.95,64.99 ; PDCLK2.3 96.31,63.35 ; PDCLK2.3 99.59,63.35 ; PDCLK2.3 97.95,61.71 ; CLK_INPUT+.3 27.91,77.42 ; CLK_INPUT+.3 26.28,75.78 ; CLK_INPUT+.3 27.91,74.14 ; CLK_INPUT+.3 29.55,75.78 ; 61.14,128.65 C24.2 ; C24.2 61.76,129.25 ; C24.2 62.37,128.65 ; 47.55,21.37 REG11.2 ; REG11.2 46.8,22.6 ; REG11.2 47.55,23.83 ; REG11.2 48.3,22.6 ; 114.99,129.51 SYNC_OUT+1.2 ; SYNC_OUT+1.2 113.35,131.15 ; SYNC_OUT+1.2 114.99,132.79 ; SYNC_OUT+1.2 116.62,131.15 ; C22.2 36.73,134.39 ; C22.2 35.8,133.19 ; C22.2 37.66,133.19 ; CLK_INPUT+.2 24.45,75.78 ; CLK_INPUT+.2 22.81,74.14 ; CLK_INPUT+.2 21.18,75.78 ; CLK_INPUT+.2 22.81,77.42 ; CLK_INPUT+.5 24.45,70.68 ; CLK_INPUT+.5 22.81,72.32 ; CLK_INPUT+.5 21.18,70.68 ; CLK_INPUT+.5 22.81,69.04 ; 73.41,56.45 C21.2 ; C21.2 74.34,57.65 ; C21.2 72.48,57.65 ; 47.45,93.17 REG5.4 ; REG5.4 47.45,95.63 ; REG5.4 45.55,94.4 ; REG5.4 49.35,94.4 ; 61.14,109.6 C41.2 ; C41.2 62.37,109.6 ; C41.2 61.76,110.2 ; C45.2 58,92.39 ; C45.2 57.07,91.19 ; C45.2 58.93,91.19 ; 68.71,134.69 C82.2 ; C82.2 69.33,134.08 ; C82.2 69.94,134.69 ; 78.92,81.75 SYNC_CLK1.2 ; SYNC_CLK1.2 80.56,80.11 ; SYNC_CLK1.2 80.56,83.39 ; SYNC_CLK1.2 82.2,81.75 ; 61.76,97.78 C19.2 ; C19.2 61.14,98.39 ; C19.2 62.37,98.39 ; SYNC_IN+2.3 140.91,57.39 ; SYNC_IN+2.3 140.91,54.11 ; SYNC_IN+2.3 142.55,55.75 ; SYNC_IN+2.3 139.27,55.75 ; 91.21,131.15 PDCLK1.2 ; PDCLK1.2 94.49,131.15 ; PDCLK1.2 92.85,129.51 ; PDCLK1.2 92.85,132.79 ; FILTERED_OUT2.3 183.68,33.05 ; FILTERED_OUT2.3 180.4,33.05 ; FILTERED_OUT2.3 182.04,34.69 ; FILTERED_OUT2.3 182.04,31.41 ; 140.91,121.91 SYNC_IN+1.5 ; SYNC_IN+1.5 140.91,125.19 ; SYNC_IN+1.5 139.27,123.55 ; SYNC_IN+1.5 142.55,123.55 ; R17.2 131.55,30.68 ; R17.2 130.9,31.28 ; R17.2 130.9,30.07 ; C1.2 73.41,32.68 ; C1.2 74.34,31.47 ; C1.2 72.48,31.47 ; 35.8,97.22 C18.2 ; C18.2 36.73,98.42 ; C18.2 36.73,96.01 ; C18.2 37.66,97.22 ; 92.85,134.61 PDCLK1.3 ; PDCLK1.3 91.21,136.25 ; PDCLK1.3 92.85,137.89 ; PDCLK1.3 94.49,136.25 ; C31.2 74.49,117.4 ; C31.2 73.56,118.6 ; C31.2 73.56,116.19 ; C31.2 72.63,117.4 ; 112.07,126.61 SYNC_OUT-1.4 ; SYNC_OUT-1.4 113.71,128.25 ; SYNC_OUT-1.4 110.44,128.25 ; SYNC_OUT-1.4 112.07,129.89 ; C35.2 58.93,117.2 ; C35.2 58,115.99 ; C35.2 57.07,117.2 ; FILTERED_OUT.2 177.53,107.06 ; FILTERED_OUT.2 175.9,105.42 ; FILTERED_OUT.2 174.26,107.06 ; FILTERED_OUT.2 175.9,108.7 ; 72.63,110.44 C30.2 ; C30.2 74.49,110.44 ; C30.2 73.56,111.64 ; 134.17,50.65 SYNC_IN+2.5 ; SYNC_IN+2.5 135.81,49.01 ; SYNC_IN+2.5 137.45,50.65 ; SYNC_IN+2.5 135.81,52.29 ; FILTERED_OUT2.2 176.94,34.69 ; FILTERED_OUT2.2 176.94,31.41 ; FILTERED_OUT2.2 178.58,33.05 ; FILTERED_OUT2.2 175.3,33.05 ; 72.63,91.39 C38.2 ; C38.2 74.49,91.39 ; C38.2 73.56,92.59 ; 72.48,51.79 C15.2 ; C15.2 74.34,51.79 ; C15.2 73.41,53 ; C32.2 69.94,98.39 ; C32.2 69.33,97.78 ; C32.2 68.71,98.39 ; 114.99,61.71 SYNC_OUT+2.2 ; SYNC_OUT+2.2 113.35,63.35 ; SYNC_OUT+2.2 116.62,63.35 ; SYNC_OUT+2.2 114.99,64.99 ; 128.2,129.51 SYNC_IN-1.2 ; SYNC_IN-1.2 129.84,131.15 ; SYNC_IN-1.2 126.56,131.15 ; SYNC_IN-1.2 128.2,132.79 ; PDCLK2.5 92.85,59.89 ; PDCLK2.5 94.49,58.25 ; PDCLK2.5 91.21,58.25 ; PDCLK2.5 92.85,56.61 ; PWR_DWN.1 131.77,83.4 ; PWR_DWN.1 130.6,84.57 ; PWR_DWN.1 130.6,82.23 ; PWR_DWN.1 129.43,83.4 ; 57.8,56.65 C107.2 ; C107.2 56.87,57.85 ; C107.2 58.73,57.85 ; 43.12,126 REG2.1 ; REG2.1 45.58,126 ; REG2.1 44.35,125.25 ; REG2.1 44.35,126.75 ; 79.02,7.05 SYNC_CLK2.4 ; SYNC_CLK2.4 80.66,5.41 ; SYNC_CLK2.4 82.3,7.05 ; SYNC_CLK2.4 80.66,8.69 ; C120.2 58.73,11.15 ; C120.2 56.87,11.15 ; C120.2 57.8,12.36 ; FILTERED_OUT.5 175.9,103.6 ; FILTERED_OUT.5 174.26,101.96 ; FILTERED_OUT.5 175.9,100.32 ; FILTERED_OUT.5 177.53,101.96 ; 68.71,128.65 C74.2 ; C74.2 69.94,128.65 ; C74.2 69.33,129.25 ; C37.2 58.93,97.45 ; C37.2 57.07,97.45 ; C37.2 58,96.24 ; 47.45,113.27 REG3.4 ; REG3.4 45.55,114.5 ; REG3.4 47.45,115.73 ; REG3.4 49.35,114.5 ; 68.71,118.34 C76.2 ; C76.2 69.94,118.34 ; C76.2 69.33,117.73 ; 118.45,58.25 SYNC_OUT+2.4 ; SYNC_OUT+2.4 120.09,59.89 ; SYNC_OUT+2.4 121.72,58.25 ; SYNC_OUT+2.4 120.09,56.61 ; PWR_DWN.2 130.6,87.11 ; PWR_DWN.2 131.77,85.94 ; PWR_DWN.2 130.6,84.77 ; PWR_DWN.2 129.43,85.94 ; 46.8,42.7 REG9.2 ; REG9.2 48.3,42.7 ; REG9.2 47.55,43.93 ; REG9.2 47.55,41.47 ; PDCLK2.4 97.95,59.89 ; PDCLK2.4 99.59,58.25 ; PDCLK2.4 96.31,58.25 ; PDCLK2.4 97.95,56.61 ; 182.04,26.31 FILTERED_OUT2.4 ; FILTERED_OUT2.4 180.4,27.95 ; FILTERED_OUT2.4 182.04,29.59 ; FILTERED_OUT2.4 183.68,27.95 ; 131.66,58.15 SYNC_IN-2.4 ; SYNC_IN-2.4 133.3,59.79 ; SYNC_IN-2.4 134.94,58.15 ; SYNC_IN-2.4 133.3,56.51 ; REG11.4 49.45,16.4 ; REG11.4 47.55,17.63 ; REG11.4 47.55,15.17 ; REG11.4 45.65,16.4 ; J1.2 8.39,122.4 ; J1.2 8.39,117.79 ; J1.2 7.08,120.1 ; J1.2 9.69,120.1 ; C43.2 62.37,90.55 ; C43.2 61.76,91.15 ; C43.2 61.14,90.55 ; 133.3,61.61 SYNC_IN-2.3 ; SYNC_IN-2.3 134.94,63.25 ; SYNC_IN-2.3 131.66,63.25 ; SYNC_IN-2.3 133.3,64.89 ; C109.2 58.73,38.13 ; C109.2 57.8,36.93 ; C109.2 56.87,38.13 ; 43.12,106 REG4.1 ; REG4.1 44.35,106.75 ; REG4.1 45.58,106 ; REG4.1 44.35,105.25 ; 35.8,39.87 C48.2 ; C48.2 36.73,38.66 ; C48.2 37.66,39.87 ; 72.48,11.15 C116.2 ; C116.2 74.34,11.15 ; C116.2 73.41,12.36 ; 44.45,47.45 REG8.1 ; REG8.1 43.22,48.2 ; REG8.1 44.45,48.95 ; REG8.1 45.68,48.2 ; 27.91,69.04 CLK_INPUT+.4 ; CLK_INPUT+.4 27.91,72.32 ; CLK_INPUT+.4 26.28,70.68 ; CLK_INPUT+.4 29.55,70.68 ; SYNC_OUT+1.4 120.09,137.89 ; SYNC_OUT+1.4 120.09,134.61 ; SYNC_OUT+1.4 121.72,136.25 ; SYNC_OUT+1.4 118.45,136.25 ; SYNC_IN-1.5 133.3,132.79 ; SYNC_IN-1.5 134.94,131.15 ; SYNC_IN-1.5 133.3,129.51 ; SYNC_IN-1.5 131.66,131.15 ; SYNC_IN-2.5 129.84,58.15 ; SYNC_IN-2.5 126.56,58.15 ; SYNC_IN-2.5 128.2,59.79 ; SYNC_IN-2.5 128.2,56.51 ; C42.2 37.66,92.43 ; C42.2 36.73,93.63 ; C42.2 35.8,92.43 ; C110.2 57.8,32.68 ; C110.2 58.73,31.47 ; C110.2 56.87,31.47 ; 58,132.74 C10.2 ; C10.2 57.07,133.95 ; C10.2 58.93,133.95 ; 80.56,85.21 SYNC_CLK1.3 ; SYNC_CLK1.3 82.2,86.85 ; SYNC_CLK1.3 80.56,88.49 ; SYNC_CLK1.3 78.92,86.85 ; SYNC_IN+1.4 142.55,128.65 ; SYNC_IN+1.4 140.91,130.29 ; SYNC_IN+1.4 140.91,127.01 ; SYNC_IN+1.4 139.27,128.65 ; REG7.1 45.68,58.4 ; REG7.1 44.45,57.65 ; REG7.1 43.22,58.4 ; REG7.1 44.45,59.16 ; 73.41,16.41 C111.2 ; C111.2 72.48,17.61 ; C111.2 74.34,17.61 ; C12.2 74.49,95.98 ; C12.2 73.56,94.77 ; C12.2 72.63,95.98 ; FILTERED_OUT.4 182.63,101.96 ; FILTERED_OUT.4 181,100.32 ; FILTERED_OUT.4 179.36,101.96 ; FILTERED_OUT.4 181,103.6 ; R6.2 131.31,104.64 ; R6.2 130.66,104.03 ; R6.2 130.66,105.25 ; C13.2 74.34,36.83 ; C13.2 72.48,36.83 ; C13.2 73.41,35.63 ; 35.8,137.08 C9.2 ; C9.2 36.73,135.87 ; C9.2 37.66,137.08 ; C9.2 36.73,138.28 ; 47.45,99.37 REG5.2 ; REG5.2 48.2,100.6 ; REG5.2 46.7,100.6 ; REG5.2 47.45,101.83 ; 61.14,134.79 C11.2 ; C11.2 61.76,134.18 ; C11.2 62.37,134.79 ; 35.8,35.11 C49.2 ; C49.2 37.66,35.11 ; C49.2 36.73,36.31 ; C108.2 58.73,51.79 ; C108.2 56.87,51.79 ; C108.2 57.8,53
  vias: v1(23.1,91.8) v1(23.1,90.8) v1(23.1,89.8) v1(23.1,88.8) v1(23.1,87.8) v1(23.1,86.8) v1(23.1,85.9) v1(23.1,84.9) v1(23.4,84.2) v1(23.9,92.2) v1(24,83.6) v1(24.3,87.9) v1(24.8,83.6) v1(24.8,82.8) v1(24.8,81.8) v1(24.8,80.8) v1(24.8,79.8) v1(24.8,78.8) v1(24.8,77.8) v1(24.9,92.2) v1(25.3,87.9) v1(25.9,92.2) v1(26,83.6) v1(26,82.8) v1(26,81.8) v1(26,80.8) v1(26,79.8) v1(26,78.8) v1(26,77.8) v1(26.3,87.9) v1(26.9,92.2) v1(27,83.6) v1(27.3,87.9) v1(27.9,92.2) v1(28,83.6) v1(28.3,87.9) v1(28.9,98.2) v1(28.9,97.2) v1(28.9,96.2) v1(28.9,95.2) v1(28.9,94.2) v1(28.9,93.2) v1(28.9,92.2) v1(29,83.6) v1(29,82.7) v1(29,81.8) v1(29,80.8) v1(29,79.8) v1(29,78.8) v1(29,77.8) v1(29.3,87.9) v1(29.7,98.9) v1(29.9,77.4) v1(30.1,94.9) v1(30.3,87.9) v1(30.5,99.5) v1(30.8,100.4) v1(30.9,77.4) v1(31,139.4) v1(31,138.4) v1(31,137.4) v1(31,136.4) v1(31,135.4) v1(31,134.4) v1(31,133.4) v1(31,132.4) v1(31,131.4) v1(31,130.4) v1(31,129.4) v1(31,128.4) v1(31,127.4) v1(31,126.4) v1(31,125.4) v1(31,124.4) v1(31,123.4) v1(31,122.4) v1(31,121.4) v1(31,120.4) v1(31,119.4) v1(31,118.4) v1(31,117.4) v1(31,116.4) v1(31,115.4) v1(31,114.4) v1(31,113.4) v1(31,112.4) v1(31,111.4) v1(31,110.4) v1(31,109.4) v1(31,108.4) v1(31,107.4) v1(31,106.4) v1(31,105.4) v1(31,104.4) v1(31,103.4) v1(31,102.4) v1(31,101.4) v1(31.1,140.3) v1(31.1,94.9) v1(31.3,141.2) v1(31.3,87.9) v1(31.8,142) v1(31.9,77.4) v1(32,81.6) v1(32,80.6) v1(32,79.6) v1(32,78.6) v1(32.1,94.9) v1(32.3,139.4) v1(32.3,138.4) v1(32.3,137.4) v1(32.3,136.4) v1(32.3,135.4) v1(32.3,134.4) v1(32.3,133.4) v1(32.3,132.4) v1(32.3,131.4) v1(32.3,130.4) v1(32.3,129.4) v1(32.3,128.4) v1(32.3,127.4) v1(32.3,126.4) v1(32.3,125.4) v1(32.3,124.4) v1(32.3,123.4) v1(32.3,122.4) v1(32.3,121.4) v1(32.3,120.4) v1(32.3,119.4) v1(32.3,118.4) v1(32.3,117.4) v1(32.3,116.4) v1(32.3,115.4) v1(32.3,114.4) v1(32.3,113.4) v1(32.3,112.4) v1(32.3,111.4) v1(32.3,110.4) v1(32.3,109.4) v1(32.3,108.4) v1(32.3,107.4) v1(32.3,106.4) v1(32.3,105.4) v1(32.3,104.4) v1(32.3,103.4) v1(32.3,102.4) v1(32.3,91.6) v1(32.3,90.6) v1(32.3,89.6) v1(32.3,88.6) v1(32.3,87.6) v1(32.3,86.6) v1(32.3,85.6) v1(32.3,84.6) v1(32.3,83.6) v1(32.3,82.6) v1(32.4,142.7) v1(32.4,101.4) v1(32.5,140.3) v1(32.5,100.4) v1(32.8,99.5) v1(33,141.2) v1(33,77.4) v1(33.1,94.9) v1(33.2,143.5) v1(33.2,82.6) v1(33.4,91.6) v1(33.6,142) v1(33.6,98.9) v1(34.2,144) v1(34.2,82.6) v1(34.2,77.4) v1(34.3,98.1) v1(34.3,97.1) v1(34.3,96.1) v1(34.3,95.1) v1(34.3,94.1) v1(34.3,93.2) v1(34.3,92.2) v1(34.5,142.7) v1(35.2,82.6) v1(35.3,144.3) v1(35.3,77.4) v1(35.4,143) v1(36.2,82.4) v1(36.2,81.5) v1(36.2,78.8) v1(36.2,77.8) v1(36.4,144.4) v1(36.4,143.1) v1(37.3,81.2) v1(37.3,78.9) v1(37.4,144.4) v1(37.4,143.1) v1(38.23,80.66) v1(38.23,79.46) v1(38.4,144.4) v1(38.4,143.1) v1(39.23,80.66) v1(39.23,79.46) v1(39.4,144.4) v1(39.4,143.1) v1(40.23,80.66) v1(40.23,79.46) v1(40.4,144.4) v1(40.4,143.1) v1(41.23,80.66) v1(41.23,79.46) v1(41.4,144.4) v1(41.4,143.1) v1(42.23,80.66) v1(42.23,79.46) v1(42.4,144.4) v1(42.4,143.1) v1(43.33,80.66) v1(43.33,79.36) v1(43.4,144.4) v1(43.4,143.1) v1(44.2,78.7) v1(44.3,80.4) v1(44.4,144.4) v1(44.4,143.1) v1(45.1,79.8) v1(45.4,144.4) v1(45.4,143.1) v1(45.62,77.28) v1(46.4,144.4) v1(46.4,143.1) v1(46.62,78.28) v1(47.03,75.87) v1(47.4,144.4) v1(47.4,143.1) v1(48.03,76.87) v1(48.4,144.4) v1(48.4,143.1) v1(49.4,144.4) v1(49.4,143.1) v1(49.86,73.04) v1(50.4,144.4) v1(50.4,143.1) v1(50.86,74.04) v1(51.4,144.4) v1(51.4,143.1) v1(52.4,144.4) v1(52.4,143.1) v1(52.69,70.21) v1(53.4,144.4) v1(53.4,143.1) v1(53.69,71.21) v1(54.1,68.8) v1(54.4,144.4) v1(54.4,143.1) v1(55.1,69.8) v1(55.4,144.4) v1(55.4,143.1) v1(55.52,67.38) v1(56.4,144.4) v1(56.4,143.1) v1(56.52,68.38) v1(57.4,144.4) v1(57.4,143.1) v1(58,67.8) v1(58,66.5) v1(58.4,144.4) v1(58.4,143.1) v1(59,67.8) v1(59,66.5) v1(59.4,144.4) v1(59.4,143.1) v1(60,67.8) v1(60,66.5) v1(60.4,144.4) v1(60.4,143.1) v1(61,67.8) v1(61,66.5) v1(61.4,144.4) v1(61.4,143.1) v1(62,67.8) v1(62,66.5) v1(62.4,144.4) v1(62.4,143.1) v1(63,67.8) v1(63,66.5) v1(63.4,144.4) v1(63.4,143.1) v1(64,67.8) v1(64,66.5) v1(64.4,144.4) v1(64.4,143.1) v1(65,67.8) v1(65,66.5) v1(65.4,144.4) v1(65.4,143.1) v1(66,67.8) v1(66,66.5) v1(66.4,144.4) v1(66.4,143.1) v1(67,67.8) v1(67,66.5) v1(67.4,144.4) v1(67.4,143.1) v1(68,67.8) v1(68,66.5) v1(68.4,144.4) v1(68.4,143.1) v1(69,67.8) v1(69,66.5) v1(69.4,144.4) v1(69.4,143.1) v1(70,67.8) v1(70,66.5) v1(70.4,144.4) v1(70.4,143.1) v1(71,67.8) v1(71,66.5) v1(71.4,144.4) v1(71.4,143.1) v1(72,67.8) v1(72,66.5) v1(72.4,144.4) v1(72.4,143.1) v1(73,67.8) v1(73,66.5) v1(73.4,144.4) v1(73.4,143.1) v1(74,67.8) v1(74,66.5) v1(74.4,144.4) v1(74.4,143.1) v1(75,67.8) v1(75,66.5) v1(75.4,144.4) v1(75.4,143.1) v1(76,67.8) v1(76,66.5) v1(76.4,144.4) v1(76.4,143.1) v1(77,67.8) v1(77,66.5) v1(77.4,144.4) v1(77.4,143.1) v1(78,67.8) v1(78,66.5) v1(78.4,144.4) v1(78.4,143.1) v1(79,67.8) v1(79,66.5) v1(79.4,144.4) v1(79.4,143.1) v1(80.4,144.4) v1(80.4,143.1) v1(80.9,67.8) v1(80.9,66.5) v1(81.4,144.4) v1(81.4,143.1) v1(81.9,67.8) v1(81.9,66.5) v1(82.4,144.4) v1(82.4,143.1) v1(82.9,67.8) v1(82.9,66.5) v1(83.4,144.4) v1(83.4,143.1) v1(83.9,67.8) v1(83.9,66.5) v1(84.4,144.4) v1(84.4,143.1) v1(84.9,67.8) v1(84.9,66.5) v1(85.4,144.4) v1(85.4,143.1) v1(85.9,67.8) v1(85.9,66.5) v1(86.4,144.4) v1(86.4,143.1) v1(86.9,67.8) v1(86.9,66.5) v1(87.4,144.4) v1(87.4,143.1) v1(87.9,67.8) v1(87.9,66.5) v1(88.4,144.4) v1(88.4,143.1) v1(88.9,67.8) v1(88.9,66.5) v1(89.4,144.4) v1(89.4,143.1) v1(89.9,67.8) v1(89.9,66.5) v1(90.4,144.4) v1(90.4,143.1) v1(90.9,67.8) v1(90.9,66.5) v1(91.4,144.4) v1(91.4,143.1) v1(91.9,67.8) v1(91.9,66.5) v1(92.4,144.4) v1(92.4,143.1) v1(92.9,67.8) v1(92.9,66.5) v1(93.4,144.4) v1(93.4,143.1) v1(93.9,67.8) v1(93.9,66.5) v1(94.4,144.4) v1(94.4,143.1) v1(94.9,67.8) v1(94.9,66.5) v1(95.4,144.4) v1(95.4,143.1) v1(95.9,67.8) v1(95.9,66.5) v1(96.4,144.4) v1(96.4,143.1) v1(96.9,67.8) v1(96.9,66.5) v1(97.4,144.4) v1(97.4,143.1) v1(97.9,67.8) v1(97.9,66.5) v1(98.4,144.4) v1(98.4,143.1) v1(98.9,67.8) v1(98.9,66.5) v1(99.4,144.4) v1(99.4,143.1) v1(99.9,67.8) v1(99.9,66.5) v1(100.4,144.4) v1(100.4,143.1) v1(101.1,67.8) v1(101.1,66.5) v1(101.4,144.4) v1(101.4,143.1) v1(102.4,144.4) v1(102.4,143.1) v1(102.4,67.8) v1(102.4,66.5) v1(103.4,144.4) v1(103.4,143.1) v1(103.8,67.8) v1(103.8,66.5) v1(104.4,144.4) v1(104.4,143.1) v1(105,67.8) v1(105,66.5) v1(105.4,144.4) v1(105.4,143.1) v1(106,67.8) v1(106,66.5) v1(106.4,144.4) v1(106.4,143.1) v1(106.4,28.5) v1(106.4,27.6) v1(107,67.8) v1(107,66.5) v1(107.1,36) v1(107.2,37.3) v1(107.2,28.5) v1(107.2,27.6) v1(107.4,144.4) v1(107.4,143.1) v1(107.9,38.2) v1(107.9,35.3) v1(108,67.8) v1(108,66.5) v1(108.4,144.4) v1(108.4,143.1) v1(109,67.8) v1(109,66.5) v1(109.4,144.4) v1(109.4,143.1) v1(110,67.8) v1(110,66.5) v1(110.4,144.4) v1(110.4,143.1) v1(111,67.8) v1(111.4,144.4) v1(111.4,143.1) v1(112.4,144.4) v1(112.4,143.1) v1(112.6,66.5) v1(113.4,144.4) v1(113.4,143.1) v1(113.6,67.8) v1(113.6,66.5) v1(113.6,43) v1(114.4,144.4) v1(114.4,143.1) v1(114.4,44) v1(114.6,67.8) v1(114.6,66.5) v1(114.6,21.6) v1(114.6,20.8) v1(115.4,144.4) v1(115.4,143.1) v1(115.4,44) v1(115.5,20.5) v1(115.6,67.8) v1(115.6,66.5) v1(116.4,144.4) v1(116.4,143.1) v1(116.6,67.8) v1(116.6,66.5) v1(116.6,20.5) v1(117.4,144.4) v1(117.4,143.1) v1(117.4,43.9) v1(117.6,67.8) v1(117.6,66.5) v1(118.4,144.4) v1(118.4,143.1) v1(118.4,43.9) v1(118.6,67.8) v1(118.6,66.5) v1(119.4,144.4) v1(119.4,143.1) v1(119.6,67.8) v1(119.6,66.5) v1(119.7,93.2) v1(119.9,20.5) v1(120.3,43.9) v1(120.4,144.4) v1(120.4,143.1) v1(120.6,67.8) v1(120.6,66.5) v1(120.8,93.2) v1(120.9,20.5) v1(121.4,144.4) v1(121.4,143.1) v1(121.6,67.8) v1(121.6,66.5) v1(121.7,21.7) v1(121.7,20.9) v1(122.4,144.4) v1(122.4,143.1) v1(122.6,67.8) v1(122.6,66.5) v1(122.73,117.63) v1(122.9,43.8) v1(123.4,144.4) v1(123.4,143.1) v1(123.5,117.3) v1(123.6,67.8) v1(123.6,66.5) v1(123.8,43.1) v1(124.2,117.3) v1(124.4,144.4) v1(124.4,143.1) v1(125,116.7) v1(125.4,144.4) v1(125.4,143.1) v1(125.4,67.8) v1(125.4,66.5) v1(125.6,41.1) v1(126,41.8) v1(126.1,23.7) v1(126.3,96.2) v1(126.4,144.4) v1(126.4,143.1) v1(126.7,96.9) v1(126.7,22.9) v1(126.9,67.8) v1(126.9,66.5) v1(127.4,144.4) v1(127.4,143.1) v1(127.9,67.8) v1(127.9,66.5) v1(128.3,101.4) v1(128.4,144.4) v1(128.4,143.1) v1(128.4,27.6) v1(128.5,98.1) v1(128.6,25.2) v1(128.9,67.8) v1(128.9,66.5) v1(129.3,101.4) v1(129.3,98.7) v1(129.4,144.4) v1(129.4,143.1) v1(129.4,27.6) v1(129.4,25.7) v1(129.9,102.7) v1(129.9,67.8) v1(129.9,66.5) v1(130.1,28.9) v1(130.2,34.7) v1(130.2,31.7) v1(130.3,101.4) v1(130.4,144.4) v1(130.4,143.1) v1(130.4,27.6) v1(130.5,108.5) v1(130.5,103.3) v1(130.6,29.5) v1(130.8,105.6) v1(130.9,67.8) v1(130.9,66.5) v1(131,107.8) v1(131,106.4) v1(131.4,144.4) v1(131.4,143.1) v1(131.7,33.9) v1(131.7,32.6) v1(131.8,107.8) v1(131.8,106.4) v1(131.9,67.8) v1(131.9,66.5) v1(132.1,104.7) v1(132.3,102.7) v1(132.3,101.4) v1(132.4,144.4) v1(132.4,143.1) v1(132.4,28.9) v1(132.4,27.6) v1(132.7,33.9) v1(132.7,32.6) v1(132.8,107.8) v1(132.8,106.4) v1(132.9,67.8) v1(132.9,66.5) v1(133.3,102.7) v1(133.3,101.4) v1(133.4,144.4) v1(133.4,143.1) v1(133.4,28.9) v1(133.4,27.6) v1(133.7,33.9) v1(133.7,32.6) v1(133.8,107.8) v1(133.8,106.4) v1(133.9,67.8) v1(133.9,66.5) v1(134.3,102.7) v1(134.3,101.4) v1(134.4,144.4) v1(134.4,143.1) v1(134.4,28.9) v1(134.4,27.6) v1(134.7,33.9) v1(134.7,32.6) v1(134.8,107.8) v1(134.8,106.4) v1(134.9,67.8) v1(134.9,66.5) v1(135.3,102.7) v1(135.3,101.4) v1(135.4,144.4) v1(135.4,143.1) v1(135.4,28.9) v1(135.4,27.6) v1(135.7,33.9) v1(135.7,32.6) v1(135.8,107.8) v1(135.8,106.4) v1(135.9,67.8) v1(135.9,66.5) v1(136.3,102.7) v1(136.3,101.4) v1(136.4,144.4) v1(136.4,143.1) v1(136.4,28.9) v1(136.4,27.6) v1(136.7,33.9) v1(136.7,32.6) v1(136.8,107.8) v1(136.8,106.4) v1(136.9,67.8) v1(136.9,66.5) v1(137.3,102.7) v1(137.3,101.4) v1(137.4,144.4) v1(137.4,143.1) v1(137.4,28.9) v1(137.4,27.6) v1(137.7,33.9) v1(137.7,32.6) v1(137.8,107.8) v1(137.8,106.4) v1(137.9,67.8) v1(137.9,66.5) v1(138.3,102.7) v1(138.3,101.4) v1(138.4,144.4) v1(138.4,143.1) v1(138.4,28.9) v1(138.4,27.6) v1(138.7,33.9) v1(138.7,32.6) v1(138.8,107.8) v1(138.8,106.4) v1(138.9,67.8) v1(138.9,66.5) v1(139.3,102.7) v1(139.3,101.4) v1(139.4,144.4) v1(139.4,143.1) v1(139.4,28.9) v1(139.4,27.6) v1(139.6,33.9) v1(139.6,32.6) v1(139.8,107.8) v1(139.8,106.4) v1(139.9,67.8) v1(139.9,66.5) v1(140.3,102.7) v1(140.3,101.4) v1(140.4,144.4) v1(140.4,143.1) v1(140.4,28.9) v1(140.4,27.6) v1(140.6,34.1) v1(140.6,32.7) v1(140.7,107.8) v1(140.86,106.4) v1(140.9,67.8) v1(140.9,66.5) v1(141.3,102.7) v1(141.3,101.4) v1(141.3,34.5) v1(141.4,144.4) v1(141.4,143.1) v1(141.4,28.9) v1(141.4,27.6) v1(141.59,108.01) v1(141.57,33.02) v1(141.8,35.4) v1(141.9,67.8) v1(141.9,66.5) v1(142,39.7) v1(142,38.7) v1(142,37.5) v1(142,36.6) v1(142.06,106.4) v1(142.1,40.7) v1(142.3,102.7) v1(142.3,101.4) v1(142.4,144.4) v1(142.4,143.1) v1(142.37,33.54) v1(142.4,28.9) v1(142.4,27.6) v1(142.49,108.11) v1(142.5,41.7) v1(142.9,67.8) v1(142.9,66.5) v1(142.99,34.43) v1(143.06,106.59) v1(143.2,42.6) v1(143.3,102.7) v1(143.3,101.4) v1(143.3,37.6) v1(143.3,36.7) v1(143.25,35.42) v1(143.4,144.4) v1(143.4,143.1) v1(143.36,108.32) v1(143.4,39.2) v1(143.4,28.9) v1(143.4,27.6) v1(143.8,40.2) v1(143.9,67.8) v1(143.9,66.5) v1(144.04,106.78) v1(144.1,41.1) v1(144.2,43) v1(144.32,108.61) v1(144.3,102.7) v1(144.3,101.4) v1(144.4,144.4) v1(144.4,143.1) v1(144.4,28.9) v1(144.4,27.6) v1(145,107.05) v1(145.24,109.01) v1(145.3,144.32) v1(145.3,102.7) v1(145.3,101.4) v1(145.39,142.97) v1(145.6,28.9) v1(145.6,27.6) v1(145.7,67.8) v1(145.7,66.5) v1(145.8,43.3) v1(145.8,41.9) v1(145.93,107.41) v1(146.12,109.49) v1(146.28,144.13) v1(146.35,142.69) v1(146.5,102.7) v1(146.5,101.4) v1(146.6,28.9) v1(146.6,27.6) v1(146.83,107.86) v1(146.8,67.8) v1(146.8,66.5) v1(146.94,110.05) v1(146.9,43.3) v1(146.9,41.9) v1(147.13,143.82) v1(147.26,142.27) v1(147.5,102.7) v1(147.5,101.4) v1(147.6,28.9) v1(147.6,27.6) v1(147.7,110.7) v1(147.68,108.38) v1(148.03,143.4) v1(148.1,141.73) v1(148.4,111.41) v1(148.48,108.98) v1(148.5,102.7) v1(148.5,101.4) v1(148.5,67.8) v1(148.5,66.5) v1(148.6,43.3) v1(148.6,41.9) v1(148.6,28.9) v1(148.6,27.6) v1(148.85,141.07) v1(148.89,142.88) v1(149.02,112.19) v1(149.22,109.66) v1(149.5,140.31) v1(149.5,67.8) v1(149.5,66.5) v1(149.56,113.04) v1(149.6,104.4) v1(149.6,103.3) v1(149.6,101) v1(149.6,99.7) v1(149.6,43.3) v1(149.6,41.9) v1(149.67,142.26) v1(149.7,30.6) v1(149.7,29.5) v1(149.7,27.2) v1(149.7,25.9) v1(149.89,110.39) v1(150.02,139.46) v1(150.02,113.93) v1(150.37,141.55) v1(150.42,138.55) v1(150.38,114.86) v1(150.49,111.19) v1(150.5,67.8) v1(150.5,66.5) v1(150.6,43.3) v1(150.6,41.9) v1(150.69,137.58) v1(150.65,115.82) v1(150.83,116.8) v1(150.8,104.4) v1(150.8,99.7) v1(150.9,136.8) v1(150.9,117.8) v1(150.9,30.6) v1(150.9,25.9) v1(150.98,140.76) v1(151,135.9) v1(151,134.9) v1(151,133.9) v1(151,132.9) v1(151,131.9) v1(151,130.9) v1(151,129.9) v1(151,128.9) v1(151,127.9) v1(151,126.9) v1(151,125.9) v1(151,124.9) v1(151,123.9) v1(151,122.9) v1(151,121.9) v1(151,120.9) v1(151,119.9) v1(151,118.9) v1(151.02,112.04) v1(151.5,139.9) v1(151.47,112.93) v1(151.5,67.8) v1(151.5,66.5) v1(151.6,43.3) v1(151.6,41.9) v1(151.84,113.86) v1(151.8,104.4) v1(151.8,99.7) v1(151.91,138.99) v1(151.9,30.6) v1(151.9,25.9) v1(152.11,114.82) v1(152.2,138.03) v1(152.3,115.81) v1(152.38,137.05) v1(152.4,135.9) v1(152.4,134.9) v1(152.4,133.9) v1(152.4,132.9) v1(152.4,131.9) v1(152.4,130.9) v1(152.4,129.9) v1(152.4,128.9) v1(152.4,127.9) v1(152.4,126.9) v1(152.4,125.9) v1(152.4,124.9) v1(152.4,123.9) v1(152.4,122.9) v1(152.4,121.9) v1(152.4,120.9) v1(152.4,119.9) v1(152.4,118.9) v1(152.4,117.8) v1(152.4,116.8) v1(152.5,67.8) v1(152.5,66.5) v1(152.6,43.3) v1(152.6,41.9) v1(152.8,104.4) v1(152.8,103.3) v1(152.8,102.5) v1(152.8,101.7) v1(152.8,100.9) v1(152.8,99.7) v1(152.9,30.6) v1(152.9,29.5) v1(152.9,28.7) v1(152.9,27.9) v1(152.9,27.1) v1(152.9,25.9) v1(153.5,67.8) v1(153.5,66.5) v1(153.6,102.1) v1(153.6,43.3) v1(153.6,41.9) v1(153.7,28.3) v1(153.8,104.4) v1(153.8,99.7) v1(153.9,30.6) v1(153.9,25.9) v1(154.4,102.1) v1(154.5,67.8) v1(154.5,66.5) v1(154.5,28.3) v1(154.6,43.3) v1(154.6,41.9) v1(154.7,99.7) v1(154.8,104.4) v1(154.8,25.9) v1(154.9,30.6) v1(155.3,102.1) v1(155.4,28.3) v1(155.5,67.8) v1(155.5,66.5) v1(155.5,25.2) v1(155.5,24.3) v1(155.5,23.4) v1(155.6,43.3) v1(155.6,41.9) v1(155.6,35.5) v1(155.6,34.4) v1(155.6,33.2) v1(155.6,32.2) v1(155.6,31.3) v1(155.8,108.9) v1(155.8,107.7) v1(155.8,106.6) v1(155.8,105.5) v1(155.8,104.5) v1(155.9,99.6) v1(155.9,98.6) v1(155.9,97.6) v1(156.5,104.2) v1(156.5,102.5) v1(156.5,101.5) v1(156.5,67.8) v1(156.5,66.5) v1(156.6,43.3) v1(156.6,41.9) v1(156.6,35.5) v1(156.6,30.4) v1(156.6,28.7) v1(156.6,27.7) v1(156.6,23.4) v1(157,97.6) v1(157.1,109.3) v1(157.5,67.8) v1(157.5,66.5) v1(157.6,43.3) v1(157.6,41.9) v1(157.6,35.5) v1(157.6,23.4) v1(158,97.6) v1(158.1,109.3) v1(158.5,67.8) v1(158.5,66.5) v1(158.6,43.3) v1(158.6,41.9) v1(158.6,35.5) v1(158.6,23.4) v1(158.7,107.5) v1(158.7,106.4) v1(158.7,100.4) v1(158.7,99.3) v1(159,97.6) v1(159.1,109.3) v1(159.1,26.8) v1(159.1,25.8) v1(159.2,33.6) v1(159.2,32.5) v1(159.5,67.8) v1(159.5,66.5) v1(159.6,106.4) v1(159.6,100.4) v1(159.6,43.3) v1(159.6,41.9) v1(159.6,35.5) v1(159.6,23.4) v1(160,97.6) v1(160.1,109.3) v1(160.3,32.5) v1(160.3,26.8) v1(160.5,107.5) v1(160.5,106.4) v1(160.5,100.4) v1(160.5,99.3) v1(160.5,67.8) v1(160.5,66.5) v1(160.6,43.3) v1(160.6,41.9) v1(160.6,35.5) v1(160.6,23.4) v1(161,97.6) v1(161.1,109.3) v1(161.4,33.6) v1(161.4,32.5) v1(161.5,67.8) v1(161.5,66.5) v1(161.5,26.8) v1(161.5,25.8) v1(161.6,43.3) v1(161.6,41.9) v1(161.6,35.5) v1(161.6,23.4) v1(162,97.6) v1(162.1,109.3) v1(162.5,67.8) v1(162.5,66.5) v1(162.6,43.3) v1(162.6,41.9) v1(162.6,35.5) v1(162.6,23.4) v1(163,97.6) v1(163.1,109.3) v1(163.5,67.8) v1(163.5,66.5) v1(163.6,107.5) v1(163.6,106.4) v1(163.6,43.3) v1(163.6,41.9) v1(163.6,35.5) v1(163.6,23.4) v1(163.7,100.4) v1(163.7,99.3) v1(164,97.6) v1(164.1,109.3) v1(164.5,67.8) v1(164.5,66.5) v1(164.6,106.4) v1(164.6,100.4) v1(164.6,43.3) v1(164.6,41.9) v1(164.6,35.5) v1(164.6,23.4) v1(164.8,26.8) v1(164.8,25.8) v1(164.9,33.6) v1(164.9,32.5) v1(165,97.6) v1(165.1,109.3) v1(165.5,100.4) v1(165.5,99.3) v1(165.5,67.8) v1(165.5,66.5) v1(165.6,107.5) v1(165.6,106.4) v1(165.6,43.3) v1(165.6,41.9) v1(165.6,35.5) v1(165.6,23.4) v1(165.9,32.5) v1(165.9,26.8) v1(166,97.6) v1(166.1,109.3) v1(166.5,67.8) v1(166.5,66.5) v1(166.6,43.3) v1(166.6,41.9) v1(166.6,35.5) v1(166.6,23.4) v1(166.9,33.6) v1(166.9,32.5) v1(167,97.6) v1(167.1,109.3) v1(167.1,26.8) v1(167.1,25.8) v1(167.5,67.8) v1(167.5,66.5) v1(167.6,43.3) v1(167.6,41.9) v1(167.6,35.5) v1(167.6,23.4) v1(168,97.6) v1(168.1,109.3) v1(168.5,100.4) v1(168.5,99.3) v1(168.5,67.8) v1(168.5,66.5) v1(168.6,107.5) v1(168.6,106.4) v1(168.6,43.3) v1(168.6,41.9) v1(168.6,35.5) v1(168.6,23.4) v1(169,97.6) v1(169.1,109.3) v1(169.4,100.4) v1(169.5,106.4) v1(169.5,67.8) v1(169.5,66.5) v1(169.5,43.3) v1(169.5,41.9) v1(169.6,35.5) v1(169.6,23.4) v1(170,97.6) v1(170.1,109.3) v1(170.3,100.4) v1(170.3,26.8) v1(170.3,25.8) v1(170.4,106.4) v1(170.4,33.6) v1(170.4,32.5) v1(170.5,43.6) v1(170.6,67.7) v1(170.6,66.3) v1(170.6,35.5) v1(170.6,23.4) v1(170.7,42) v1(171,97.6) v1(171.1,109.3) v1(171.2,100.4) v1(171.2,99.3) v1(171.2,44.2) v1(171.3,107.5) v1(171.3,106.4) v1(171.3,65.7) v1(171.4,32.5) v1(171.4,26.8) v1(171.6,67.4) v1(171.6,35.5) v1(171.6,23.4) v1(171.7,44.9) v1(171.7,42.4) v1(171.8,64.9) v1(171.9,63.8) v1(171.9,62.9) v1(171.9,61.9) v1(171.9,60.9) v1(171.9,59.9) v1(171.9,58.9) v1(171.9,57.9) v1(171.9,56.9) v1(171.9,55.9) v1(171.9,54.9) v1(171.9,53.9) v1(171.9,52.9) v1(171.9,51.9) v1(171.9,50.9) v1(171.9,49.9) v1(171.9,48.9) v1(171.9,47.9) v1(171.9,46.9) v1(171.9,45.9) v1(172,97.6) v1(172.1,109.3) v1(172.4,66.8) v1(172.4,33.6) v1(172.4,32.5) v1(172.5,43) v1(172.5,26.8) v1(172.5,25.8) v1(172.6,35.5) v1(172.6,23.4) v1(173,97.6) v1(173,66) v1(173,43.9) v1(173.1,109.3) v1(173.2,44.8) v1(173.3,64.9) v1(173.3,63.8) v1(173.3,62.9) v1(173.3,61.9) v1(173.3,60.9) v1(173.3,59.9) v1(173.3,58.9) v1(173.3,57.9) v1(173.3,56.9) v1(173.3,55.9) v1(173.3,54.9) v1(173.3,53.9) v1(173.3,52.9) v1(173.3,51.9) v1(173.3,50.9) v1(173.3,49.9) v1(173.3,48.9) v1(173.3,47.9) v1(173.3,46.9) v1(173.3,45.9) v1(173.6,35.5) v1(173.6,23.4) v1(174.7,35.5) v1(174.7,23.4) v2(117.5,107.6) v2(117.5,106.4) v2(117.5,105.1) v2(117.5,103.9) v2(117.5,33.9) v2(117.5,32.7) v2(117.5,31.4) v2(117.5,30.2) v2(118.7,107.6) v2(118.7,106.4) v2(118.7,105.1) v2(118.7,103.9) v2(118.7,33.9) v2(118.7,32.7) v2(118.7,31.4) v2(118.7,30.2) v2(119.9,107.6) v2(119.9,106.4) v2(119.9,105.1) v2(119.9,103.9) v2(119.9,33.9) v2(119.9,32.7) v2(119.9,31.4) v2(119.9,30.2) v2(121.1,107.6) v2(121.1,106.4) v2(121.1,105.1) v2(121.1,103.9) v2(121.1,33.9) v2(121.1,32.7) v2(121.1,31.4) v2(121.1,30.2) v3(6,146.05) v3(6,134.05) v3(6,124.05) v3(6,114.05) v3(6,104.05) v3(6,94.05) v3(6,84.05) v3(6,74.05) v3(6,64.05) v3(6,54.05) v3(6,34.05) v3(6,24.05) v3(6,4.05) v3(16,146.04) v3(16,134.04) v3(16,124.04) v3(16,114.04) v3(16,104.04) v3(16,94.04) v3(16,84.04) v3(16,74.04) v3(16,64.04) v3(16,54.04) v3(16,44.04) v3(16,24.04) v3(16,14.04) v3(16,4.04) v3(26,146.04) v3(26,134.04) v3(26,124.04) v3(26,114.04) v3(26,104.04) v3(26,94.04) v3(26,64.04) v3(26,54.04) v3(26,44.04) v3(26,34.04) v3(26,24.04) v3(26,14.04) v3(26,4.04) v3(35.8,44.93) v3(36,146.03) v3(36,124.03) v3(36,104.03) v3(36,94.03) v3(36,84.03) v3(36,74.03) v3(36,4.03) v3(46,146.03) v3(46,134.03) v3(46,124.03) v3(46,104.03) v3(46,84.03) v3(46,74.03) v3(46,64.03) v3(46,54.03) v3(46,34.03) v3(46,14.03) v3(46,4.03) v3(56,146.02) v3(56,134.02) v3(56,124.02) v3(56,114.02) v3(56,104.02) v3(56,94.02) v3(56,84.02) v3(56,74.02) v3(56,64.02) v3(56,54.02) v3(56,44.02) v3(56,34.02) v3(56,24.02) v3(56,14.02) v3(56,4.02) v3(66,146.01) v3(66,84.01) v3(66,74.01) v3(66,64.01) v3(66,4.01) v3(76,146.01) v3(76,84.01) v3(76,74.01) v3(76,64.01) v3(76,54.01) v3(76,44.01) v3(76,4.01) v3(86,146) v3(86,134) v3(86,124) v3(86,94) v3(86,74) v3(86,64) v3(86,44) v3(86,34) v3(86,24) v3(86,4) v3(96,146) v3(96,14) v3(96,4) v3(106,145.99) v3(106,133.99) v3(106,83.99) v3(106,73.99) v3(106,63.99) v3(106,23.99) v3(106,3.99) v3(116,145.99) v3(116,123.99) v3(116,53.99) v3(116,3.99) v3(126,145.98) v3(126,133.98) v3(126,113.98) v3(126,83.98) v3(126,73.98) v3(126,43.98) v3(126,13.98) v3(126,3.98) v3(136,145.98) v3(136,133.98) v3(136,113.98) v3(136,93.98) v3(136,73.98) v3(136,63.98) v3(136,43.98) v3(136,23.98) v3(136,13.98) v3(136,3.98) v3(146,145.97) v3(146,133.97) v3(146,123.97) v3(146,113.97) v3(146,93.97) v3(146,83.97) v3(146,73.97) v3(146,63.97) v3(146,53.97) v3(146,13.97) v3(146,3.97) v3(156,145.97) v3(156,133.97) v3(156,123.97) v3(156,113.97) v3(156,93.97) v3(156,83.97) v3(156,73.97) v3(156,63.97) v3(156,53.97) v3(156,13.96) v3(156,3.96) v3(166,145.96) v3(166,133.96) v3(166,123.96) v3(166,113.96) v3(166,93.96) v3(166,83.96) v3(166,73.96) v3(166,63.96) v3(166,53.96) v3(166,13.96) v3(166,3.96) v3(176,145.95) v3(176,133.95) v3(176,123.95) v3(176,113.95) v3(176,93.95) v3(176,83.95) v3(176,73.95) v3(176,63.95) v3(176,53.95) v3(176,43.95) v3(176,13.95) v3(176,3.95)
